# Altium PCB BMS(1).PcbDoc (part 1 of 2)
Units mm, origin at the board's own origin, x right, y up, seen from the top; angles counter-clockwise.
Board outline 152.4 x 101.6 mm, 20 copper layers (F.Cu, F.Mask, B.Cu, B.Mask, In1.Cu, F.SilkS, In2.Cu, B.SilkS, F.Adhes, B.Adhes, F.Paste, B.Paste, Dwgs.User, Cmts.User, Eco1.User, Eco2.User, Edge.Cuts, Margin, B.CrtYd, F.CrtYd); 59 components, 46 nets, 180 pads, 56 vias.
Unrouted connection lines stored in the file: 55.
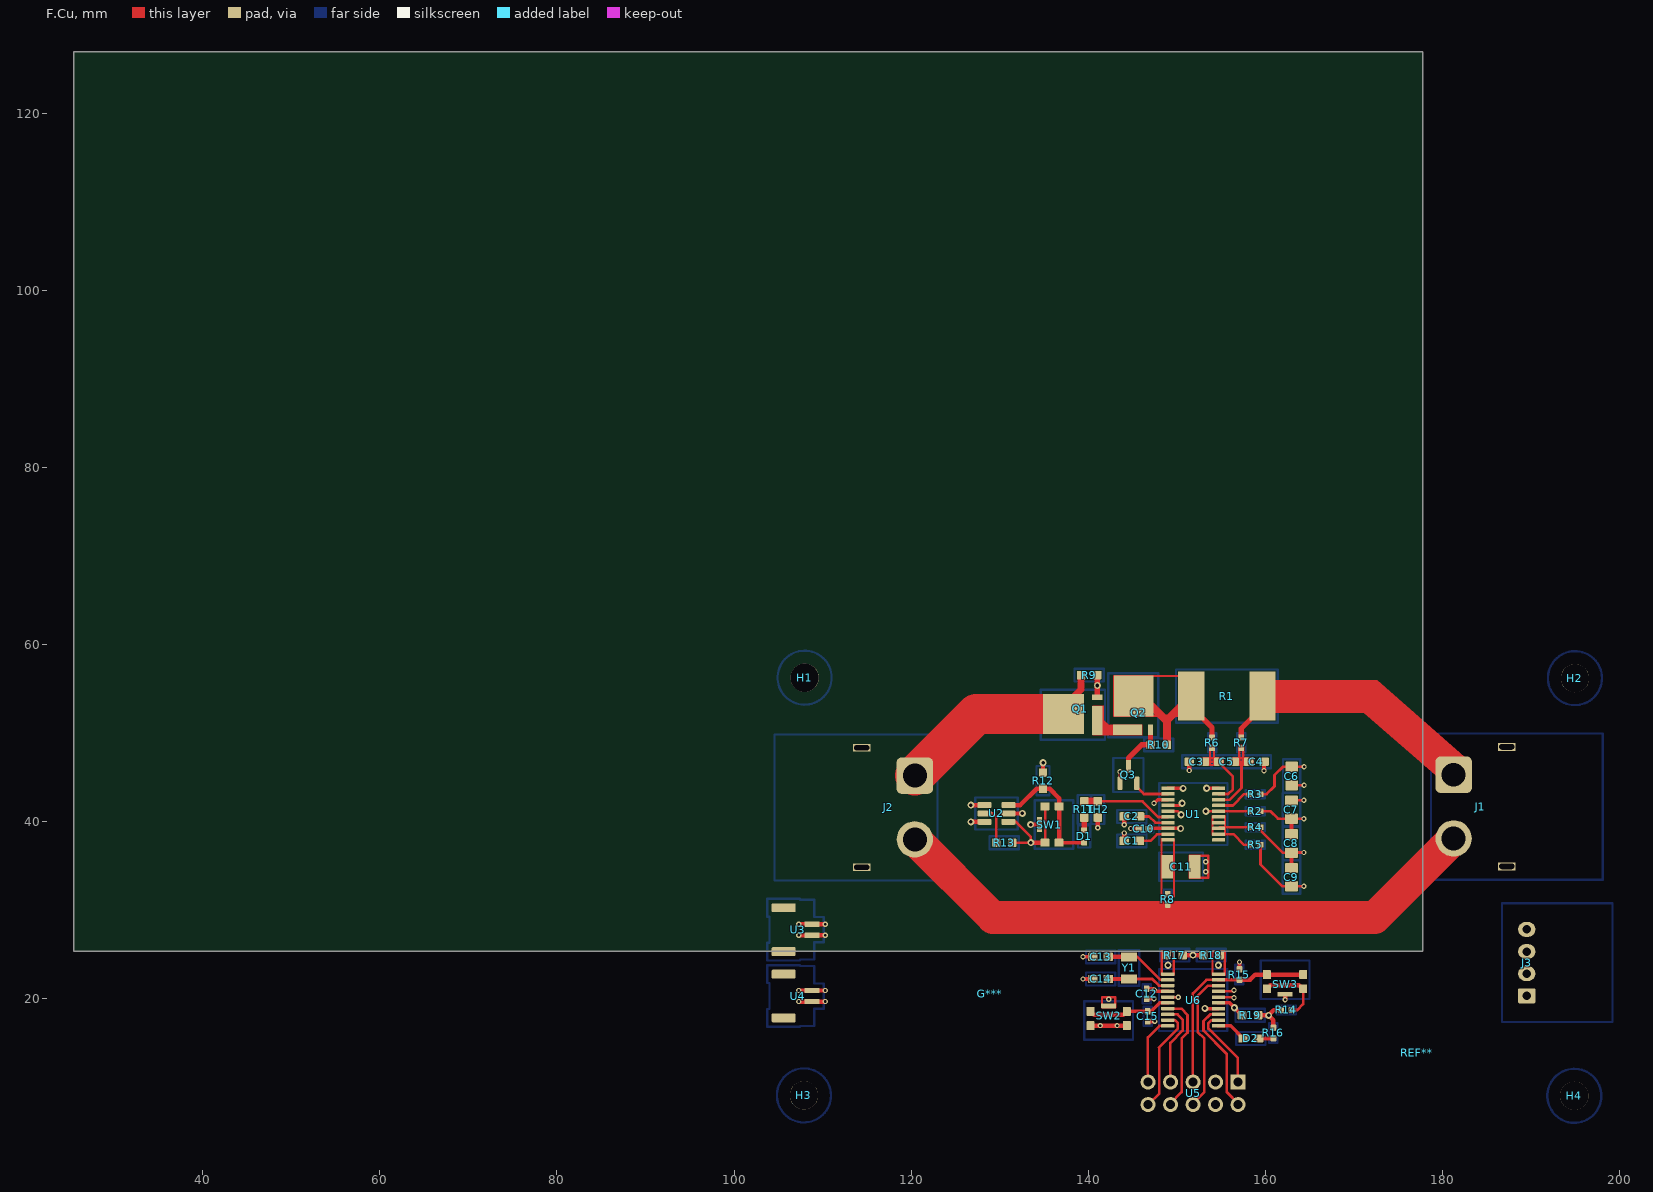
[diagram p0: F.Cu view]
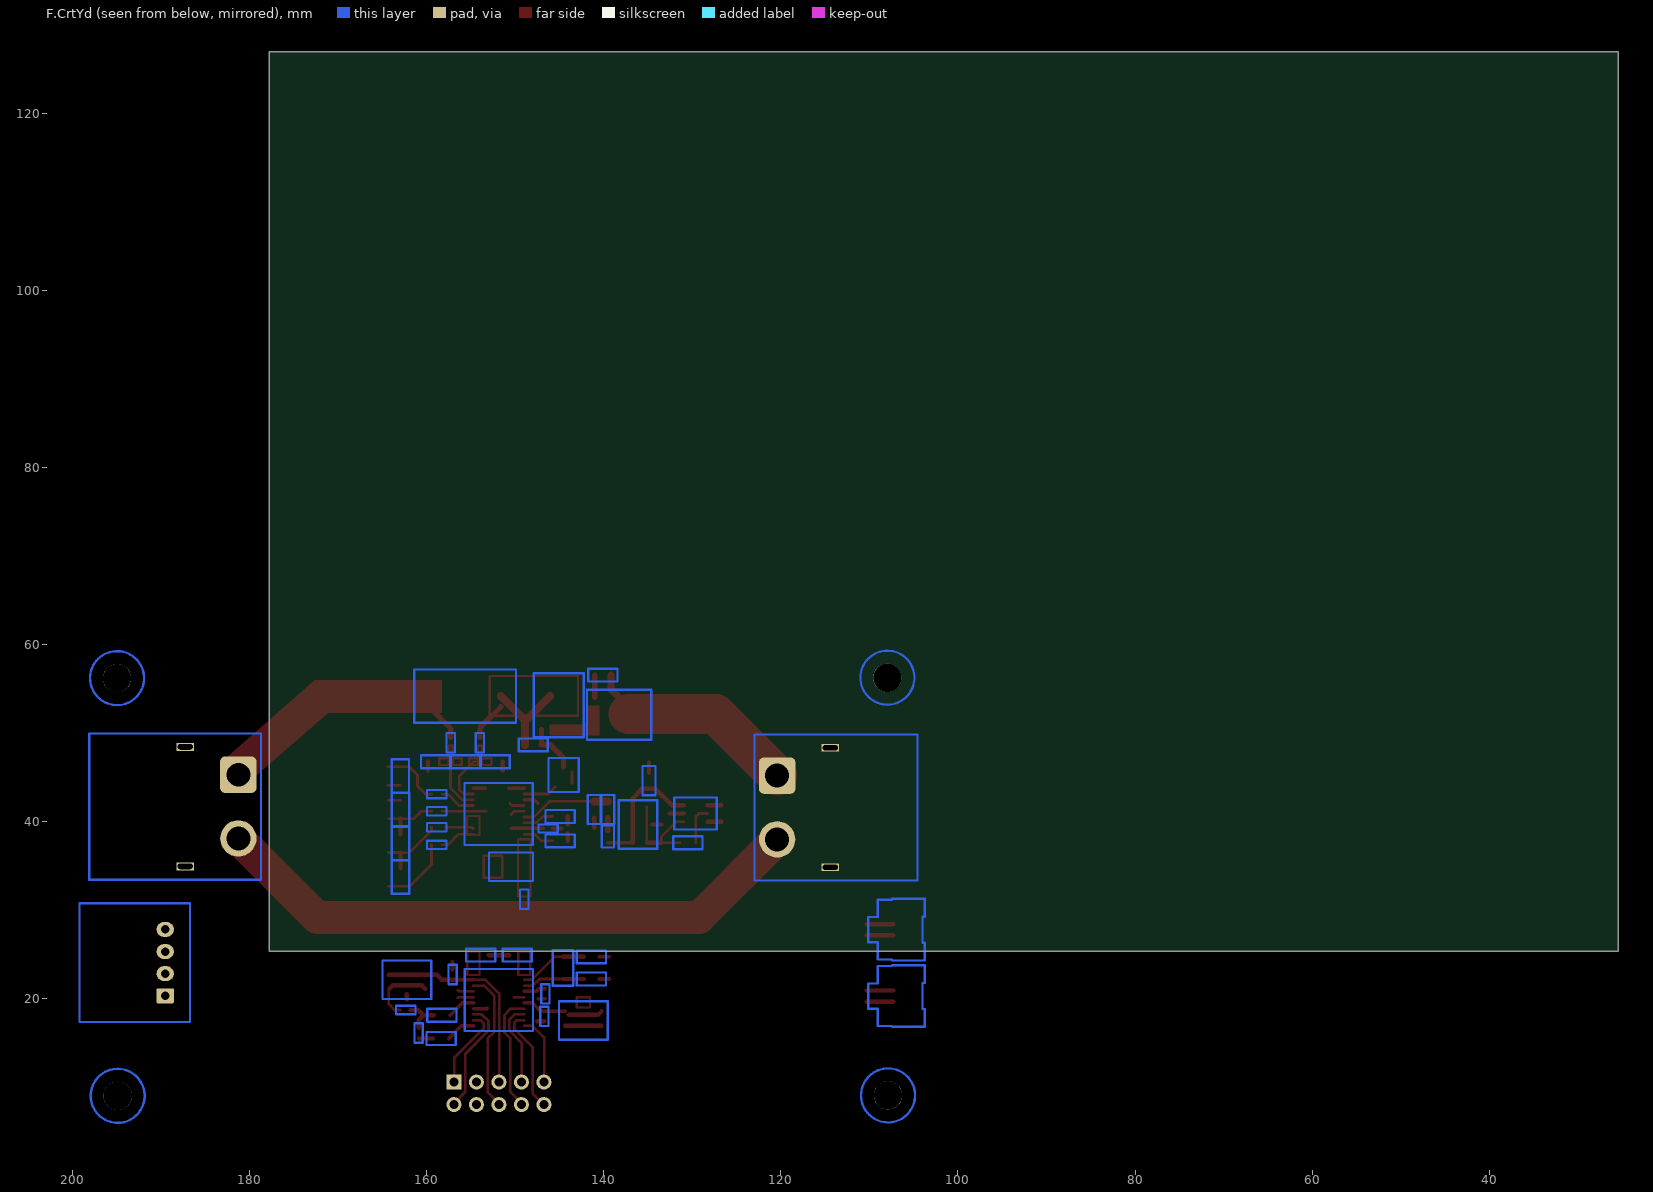
[diagram p1: F.CrtYd view, seen from below]
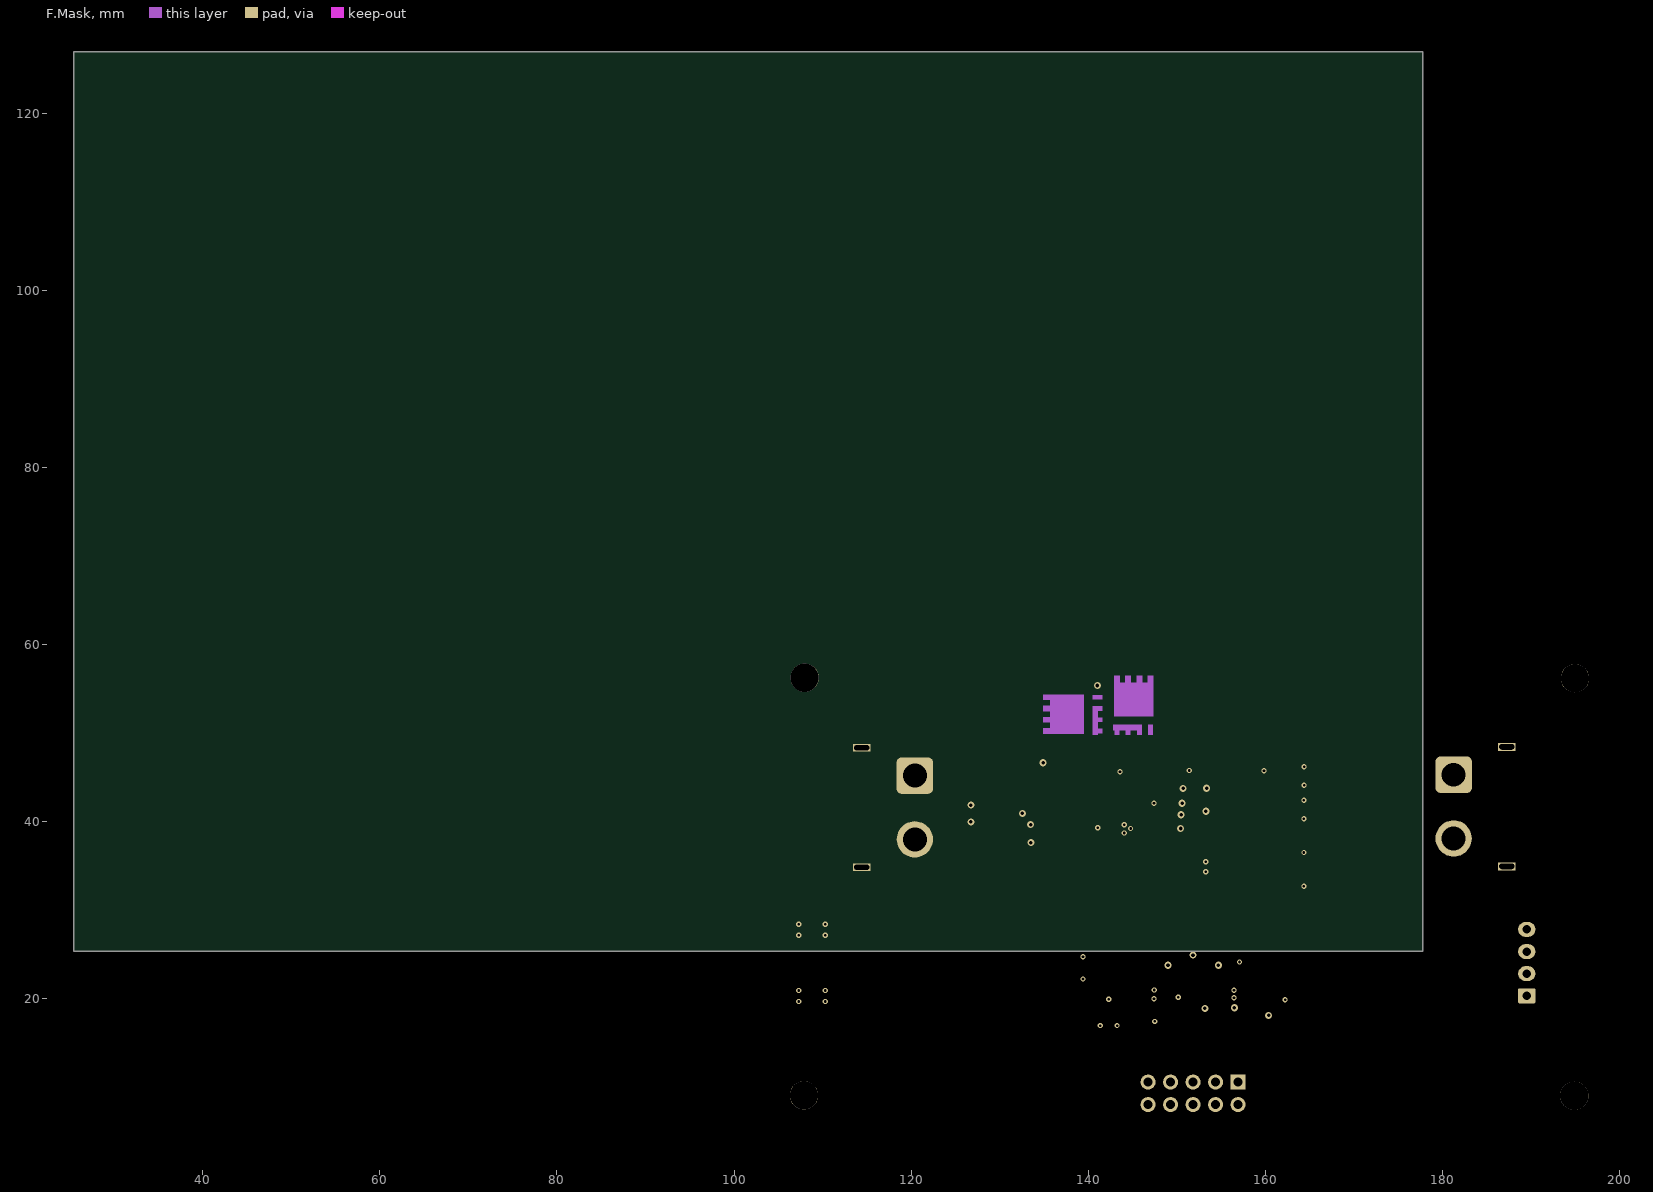
[diagram p2: F.Mask]
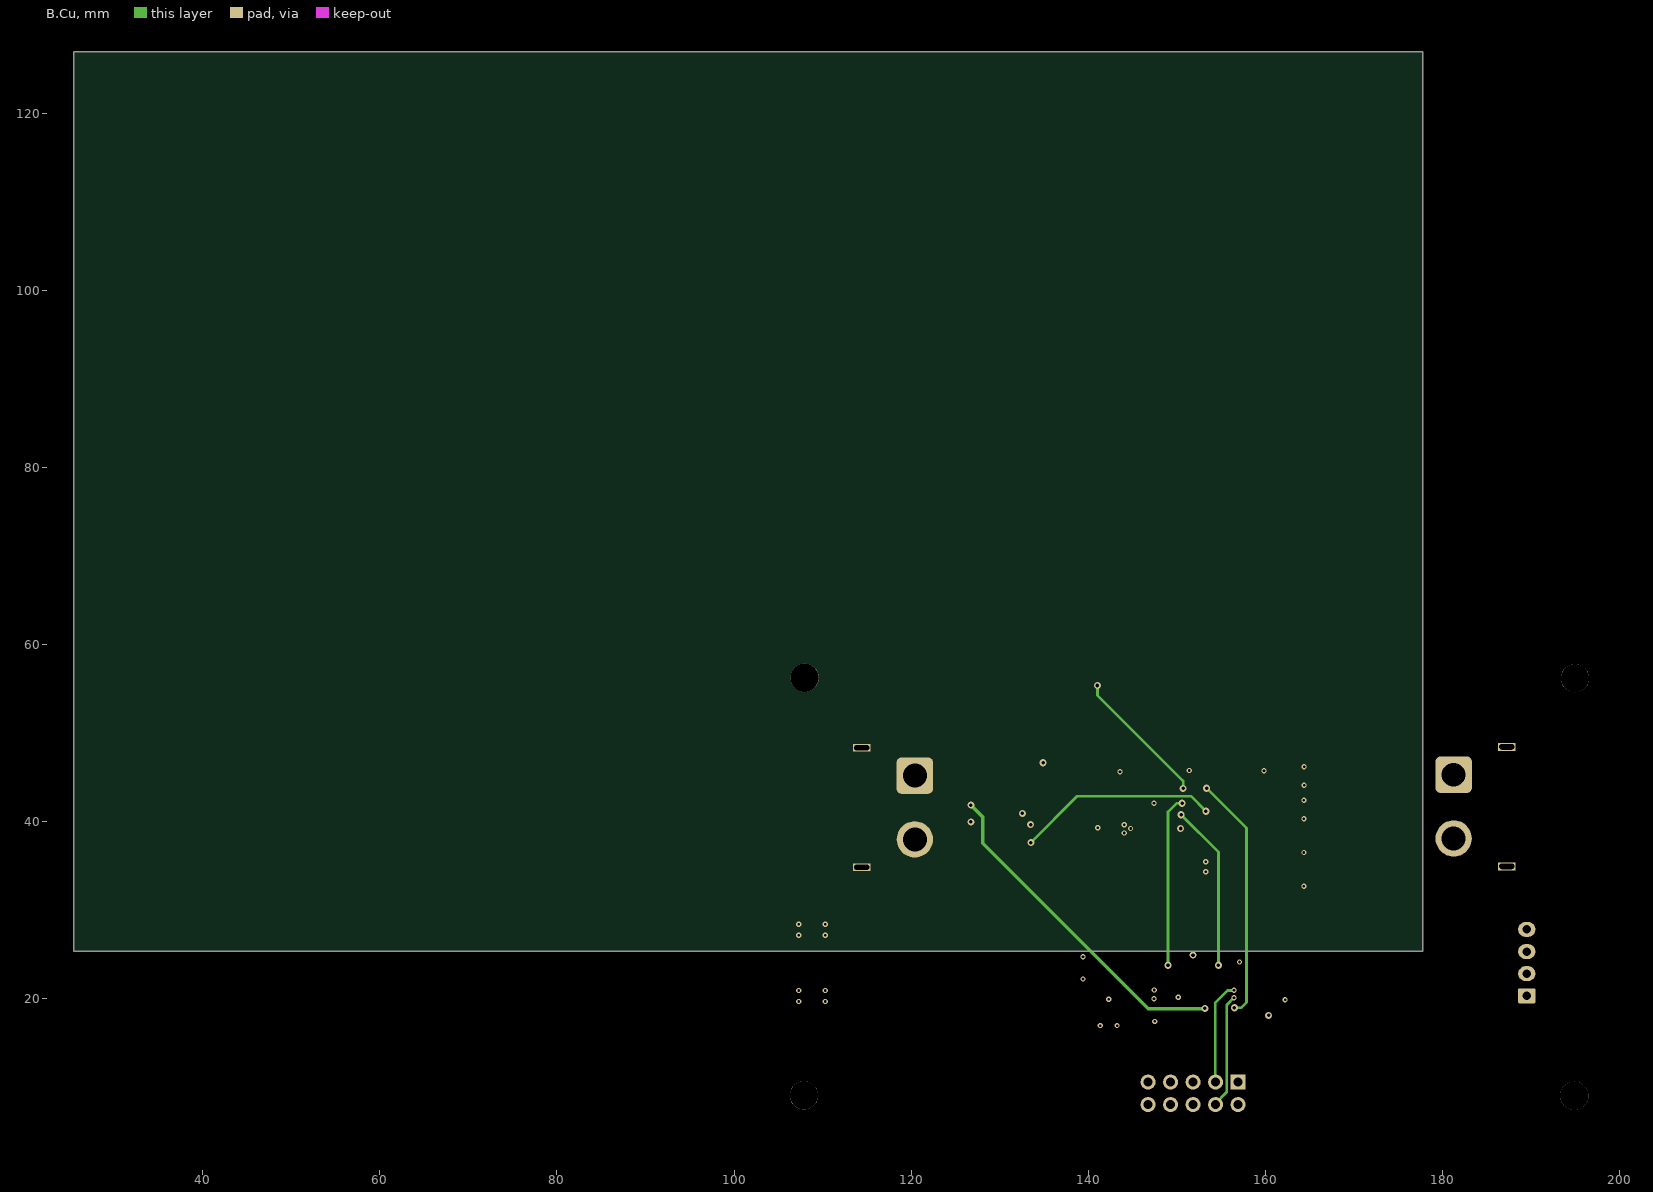
[diagram p3: B.Cu]
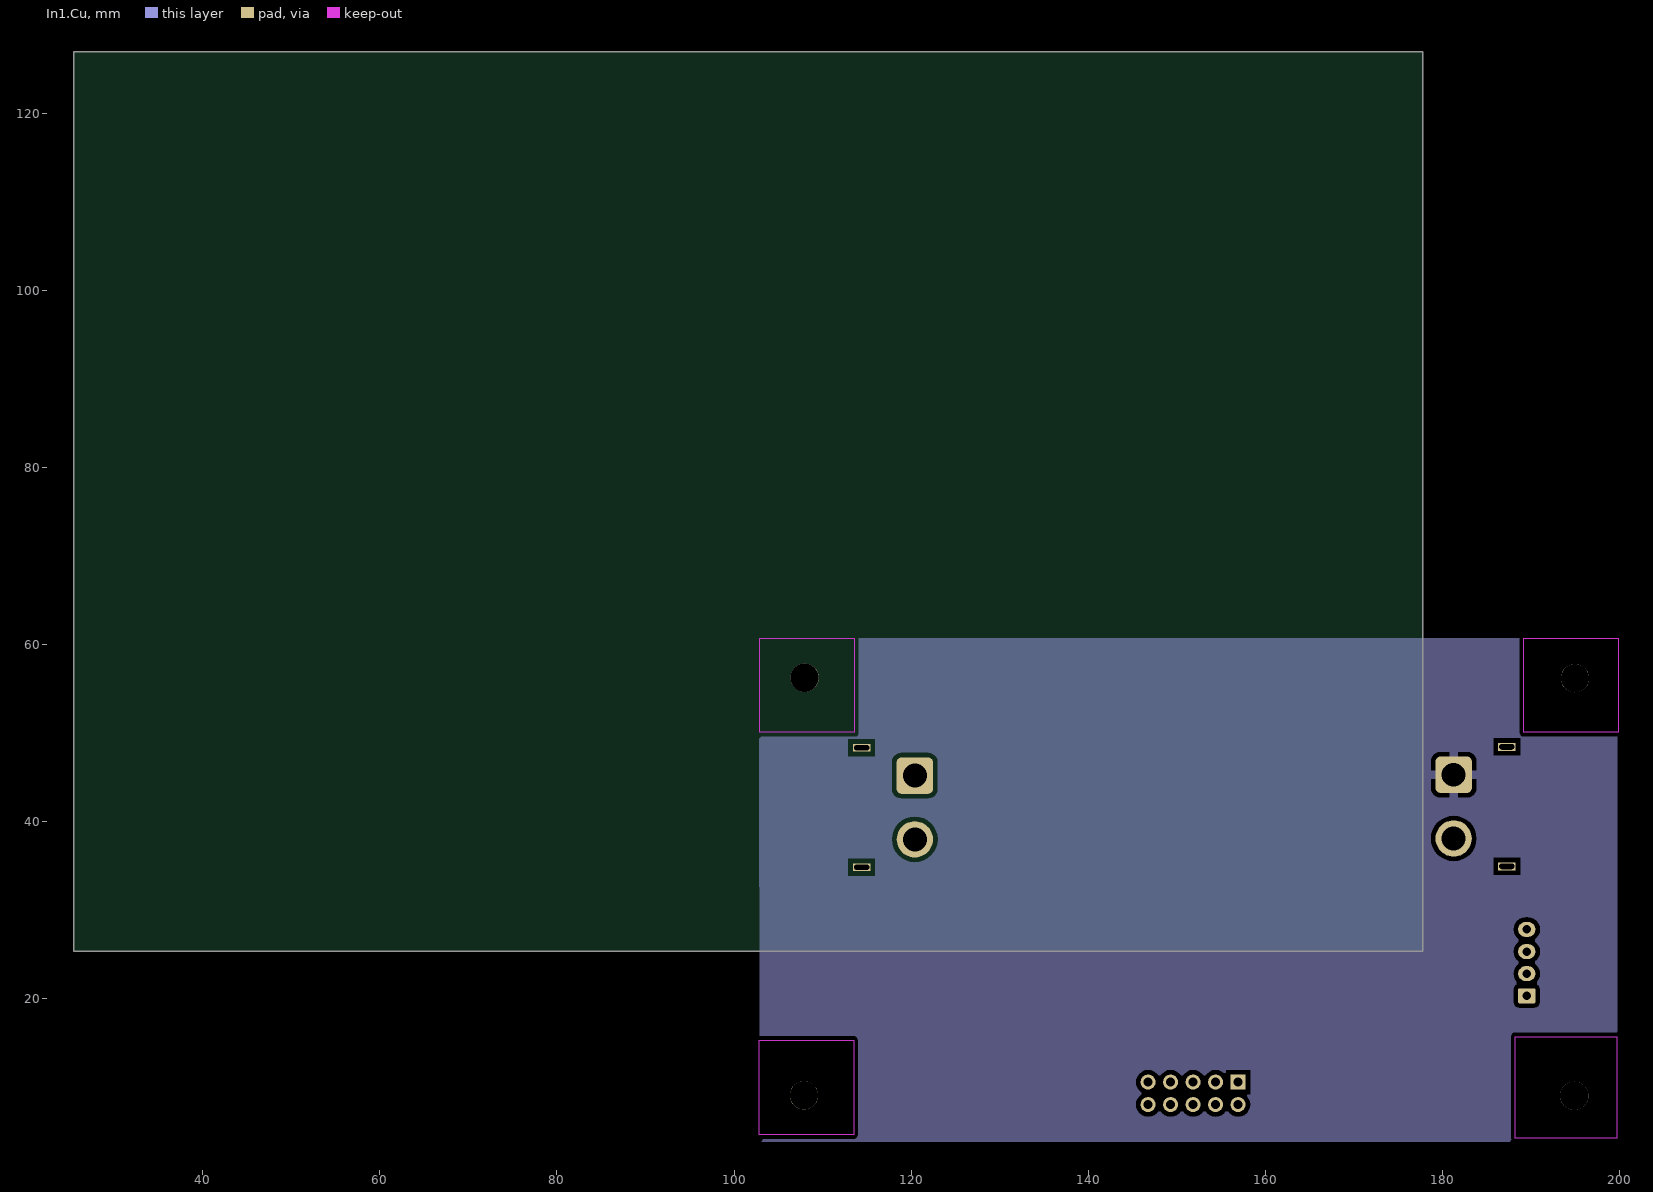
[diagram p4: In1.Cu]
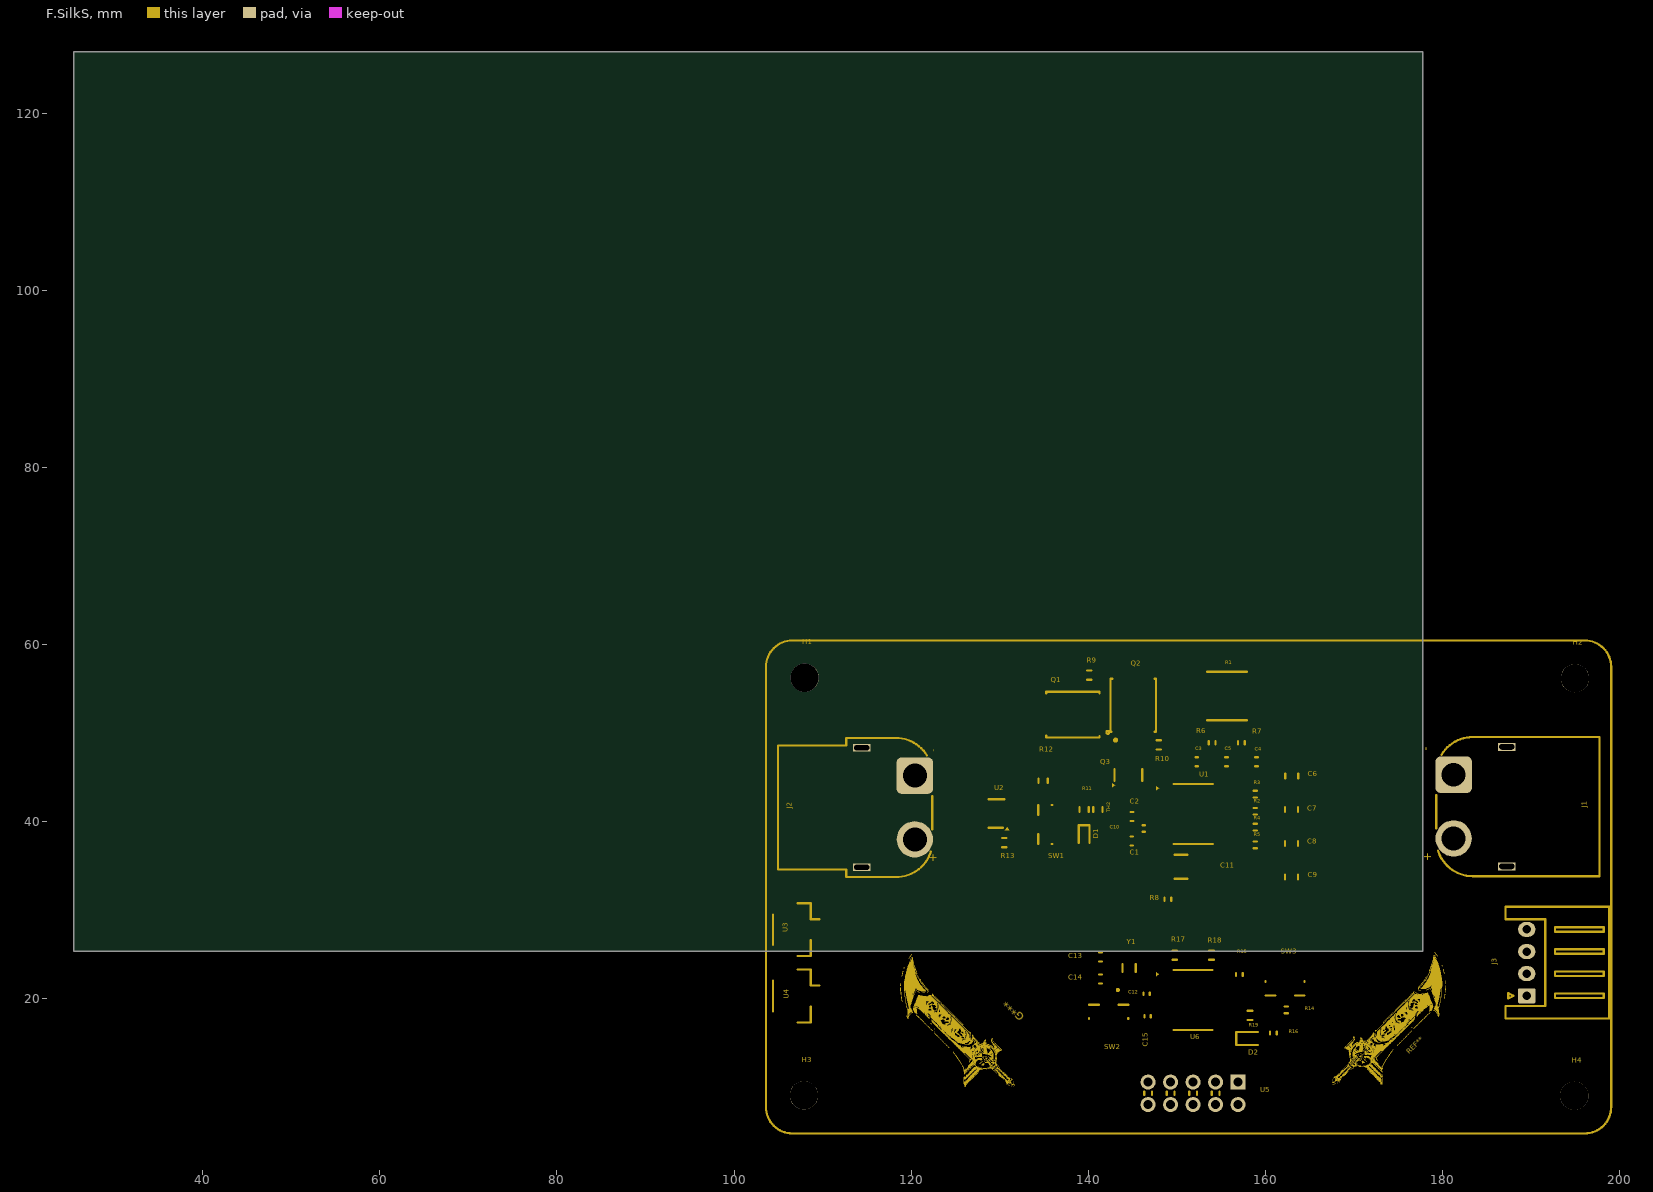
[diagram p5: F.SilkS]
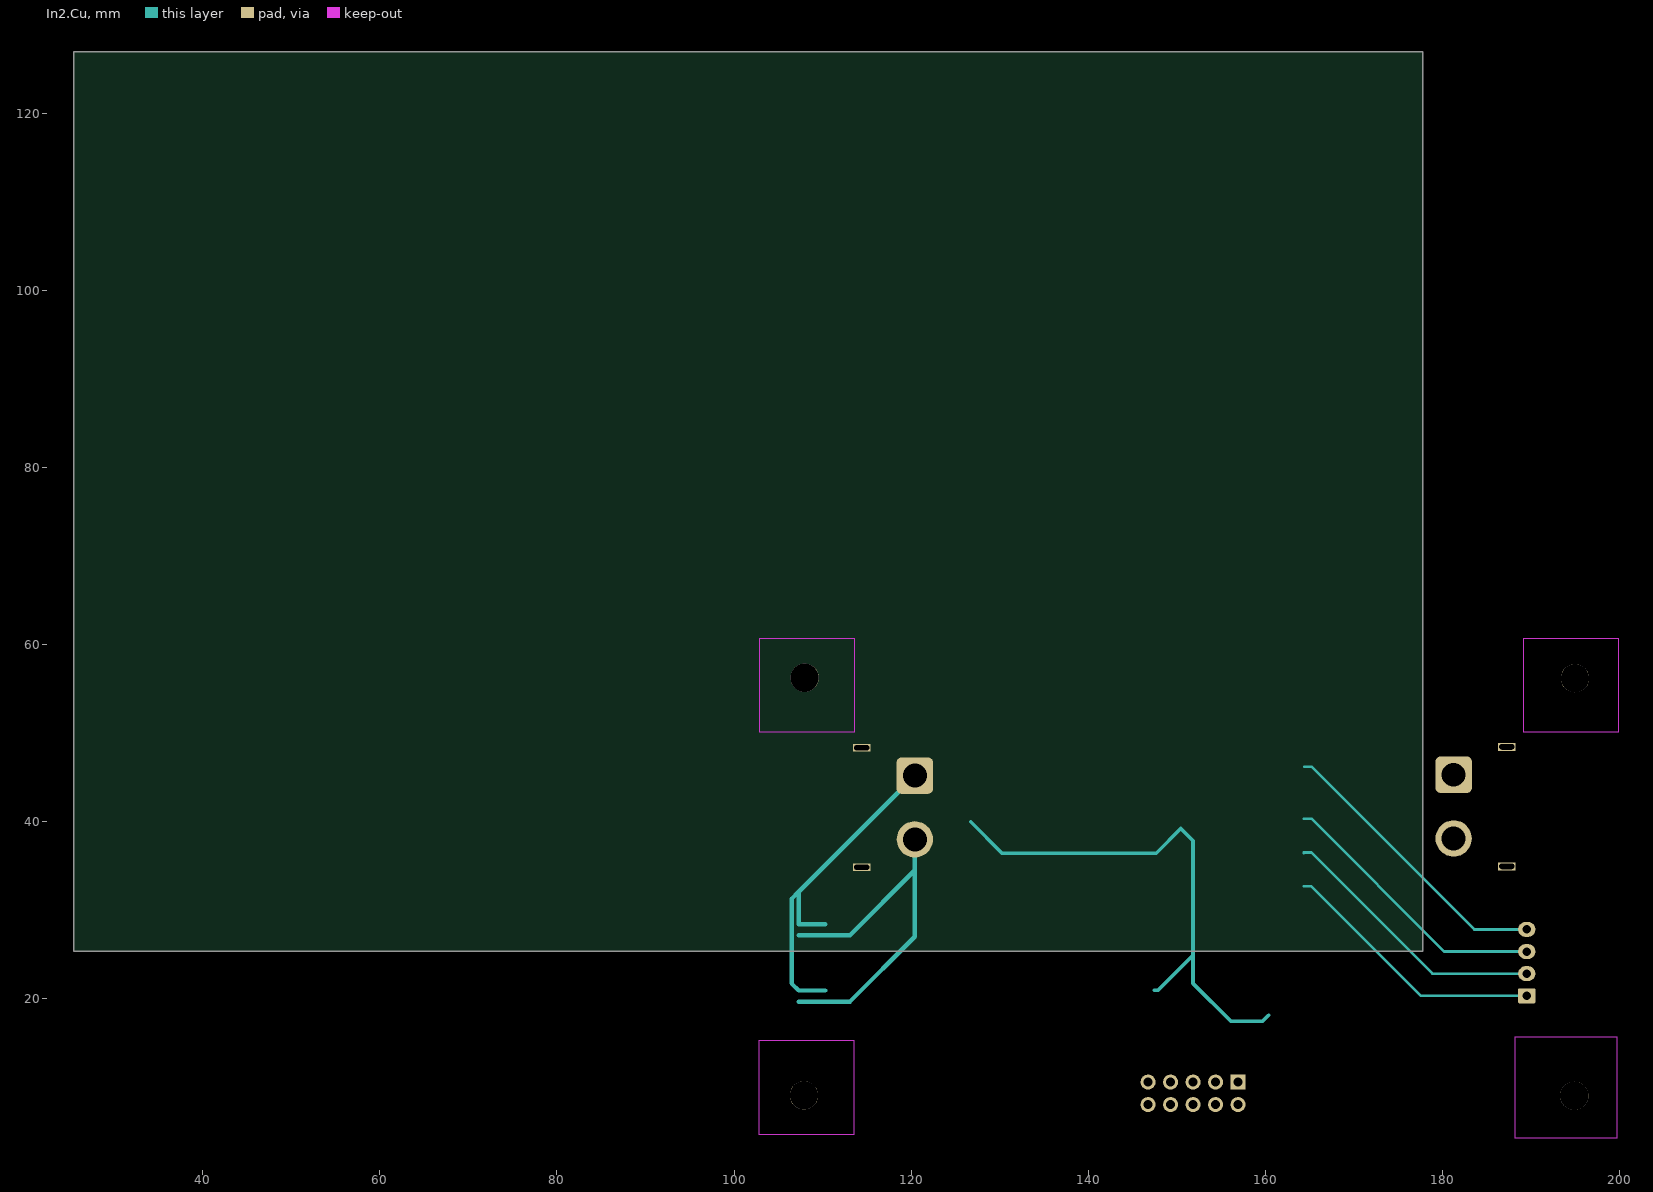
[diagram p6: In2.Cu]
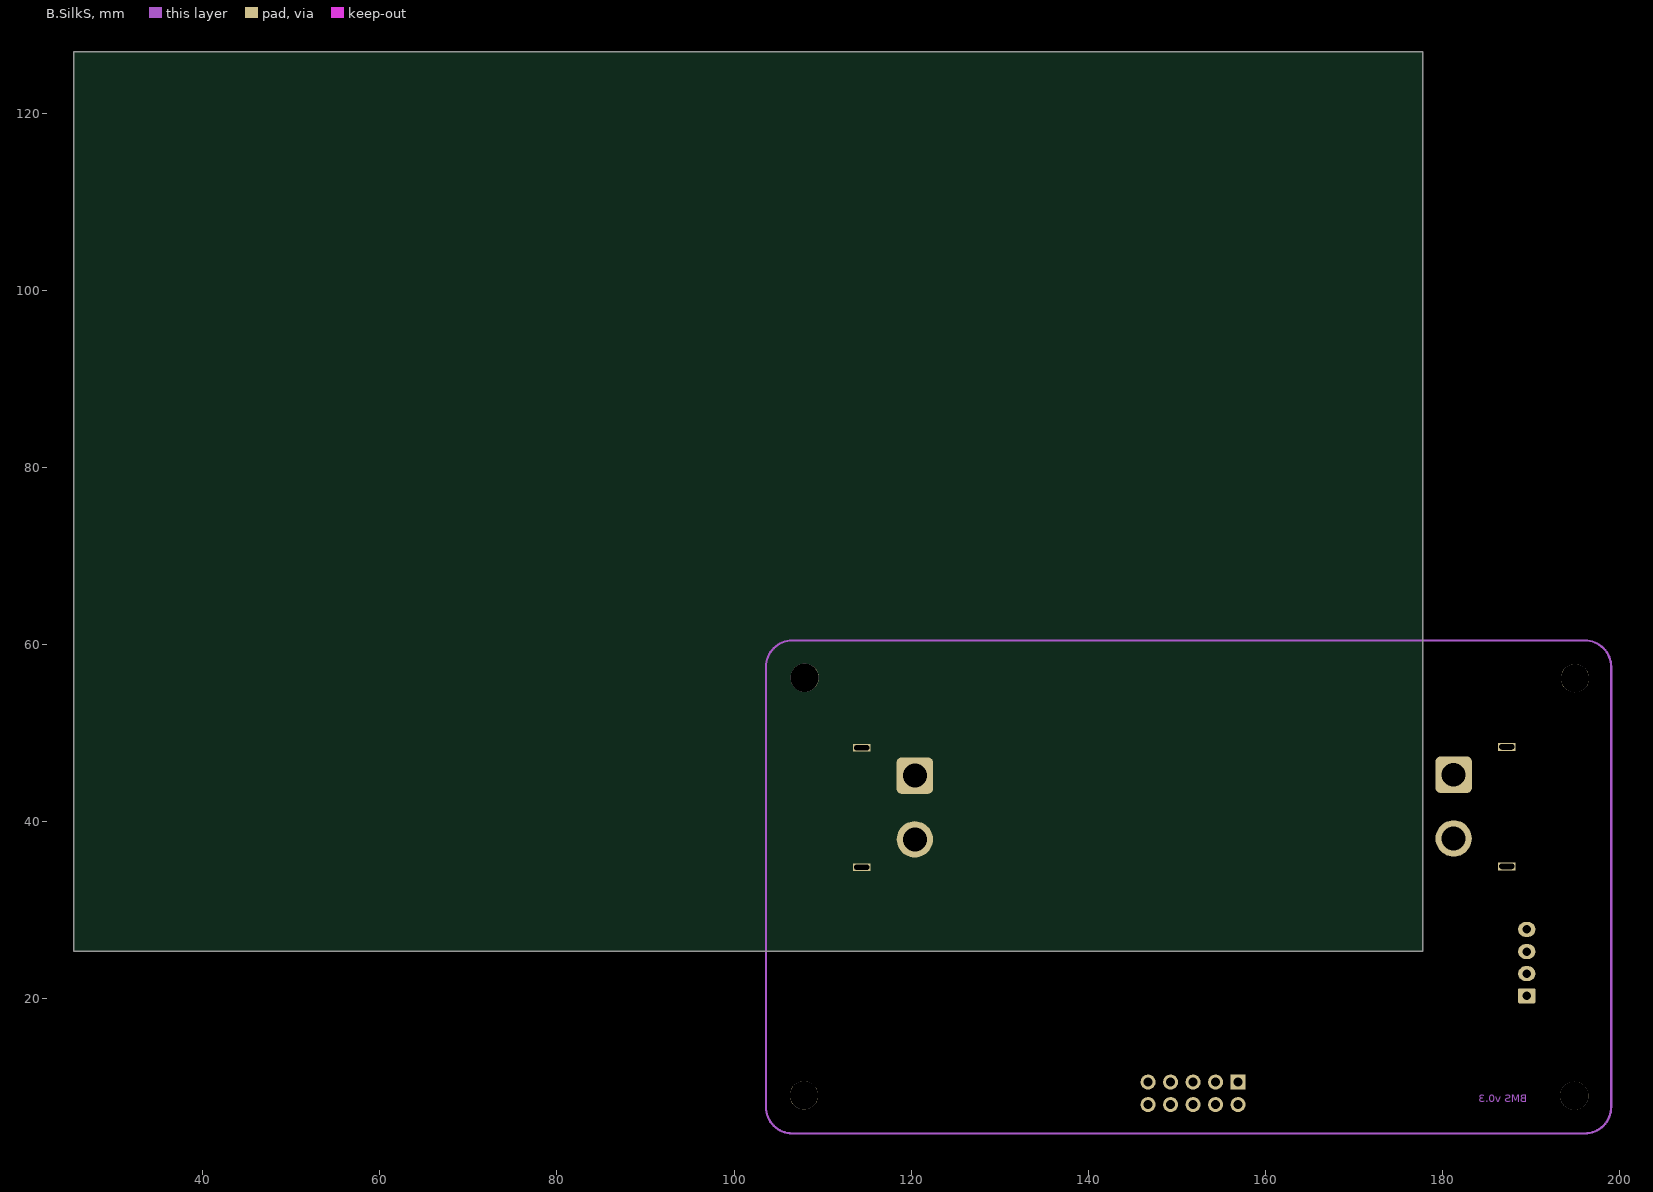
[diagram p7: B.SilkS]
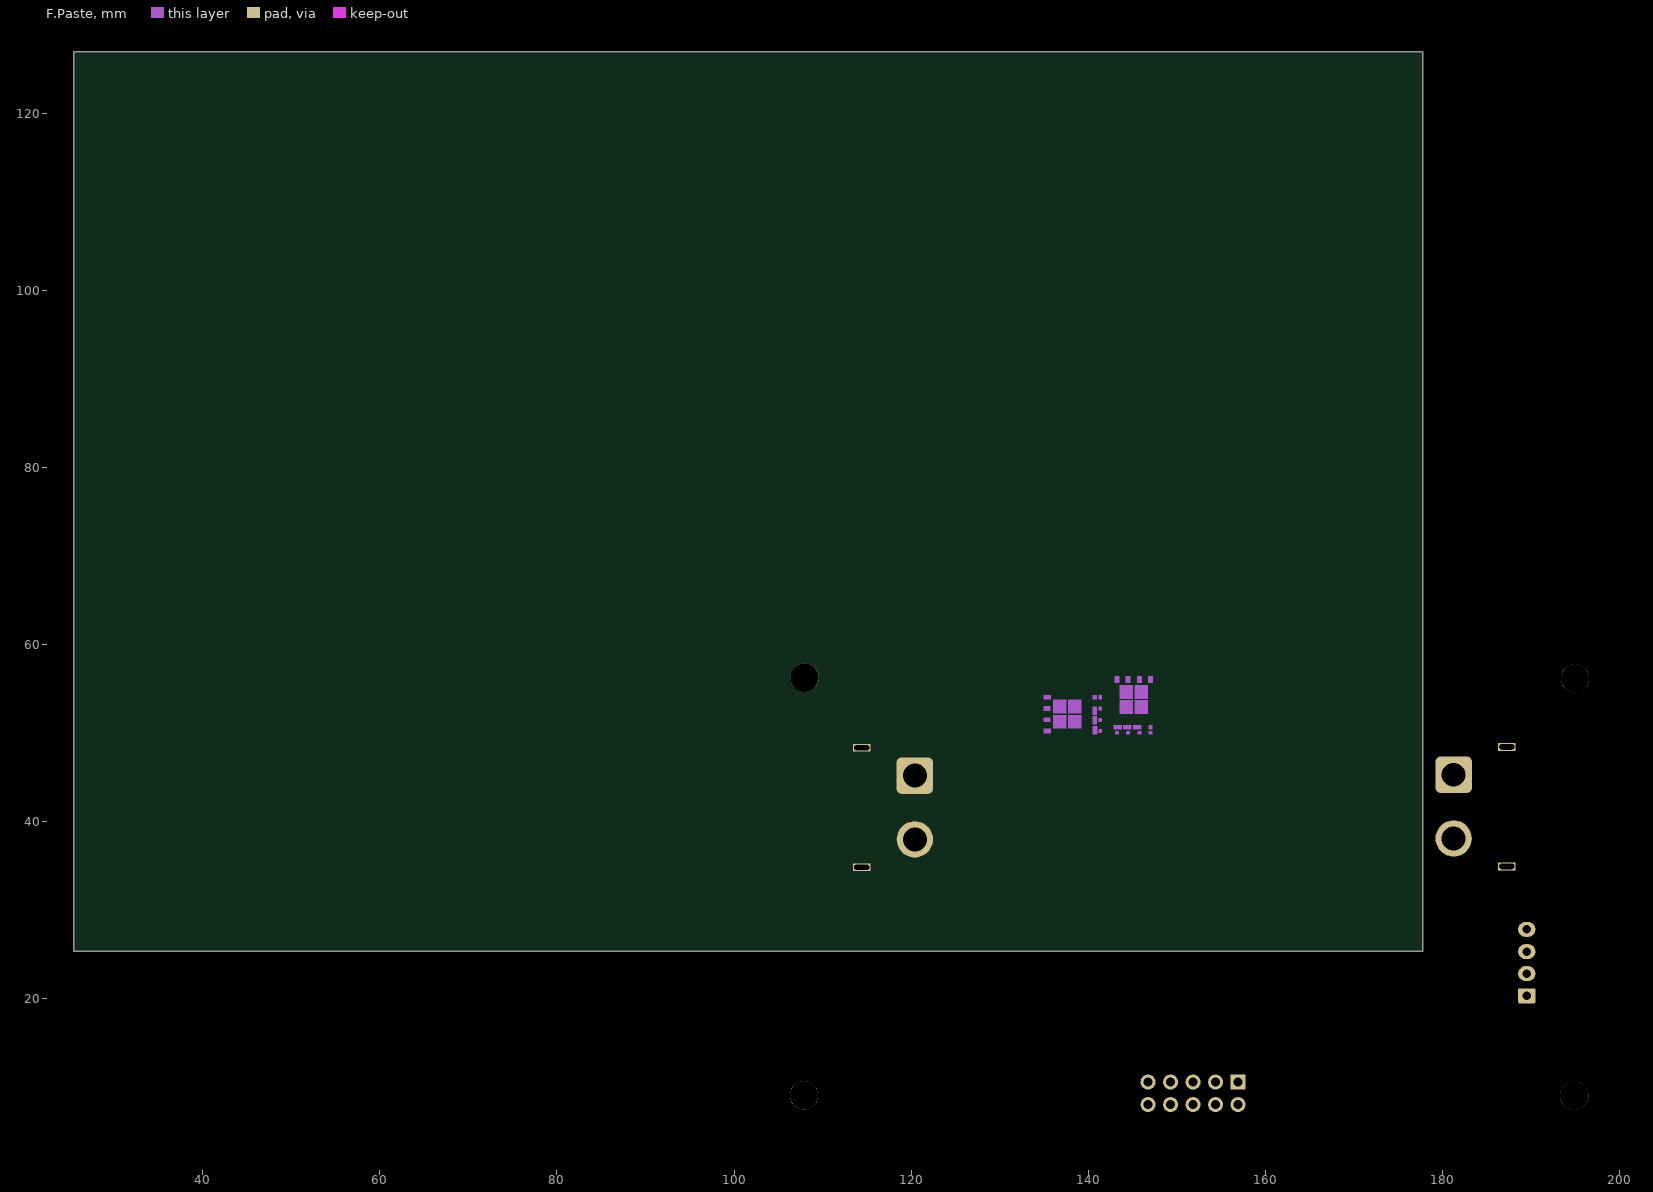
[diagram p8: F.Paste]
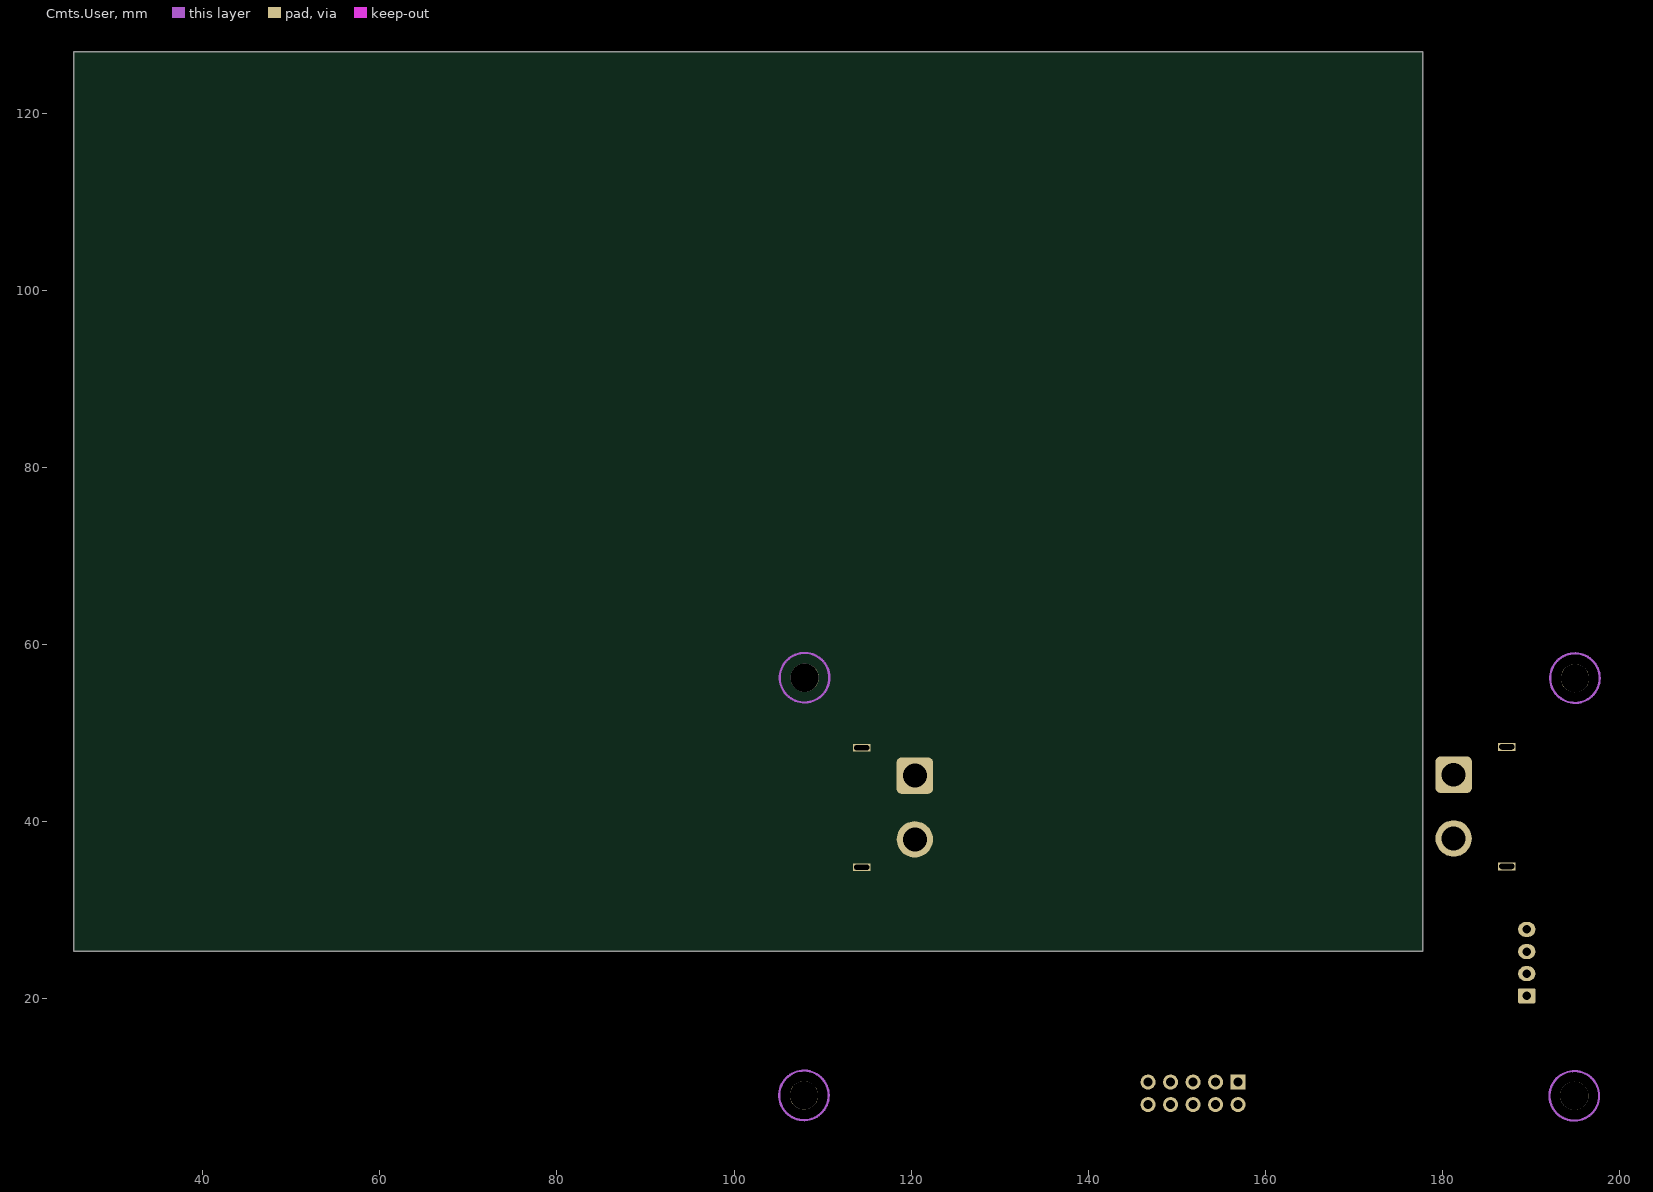
[diagram p9: Cmts.User]
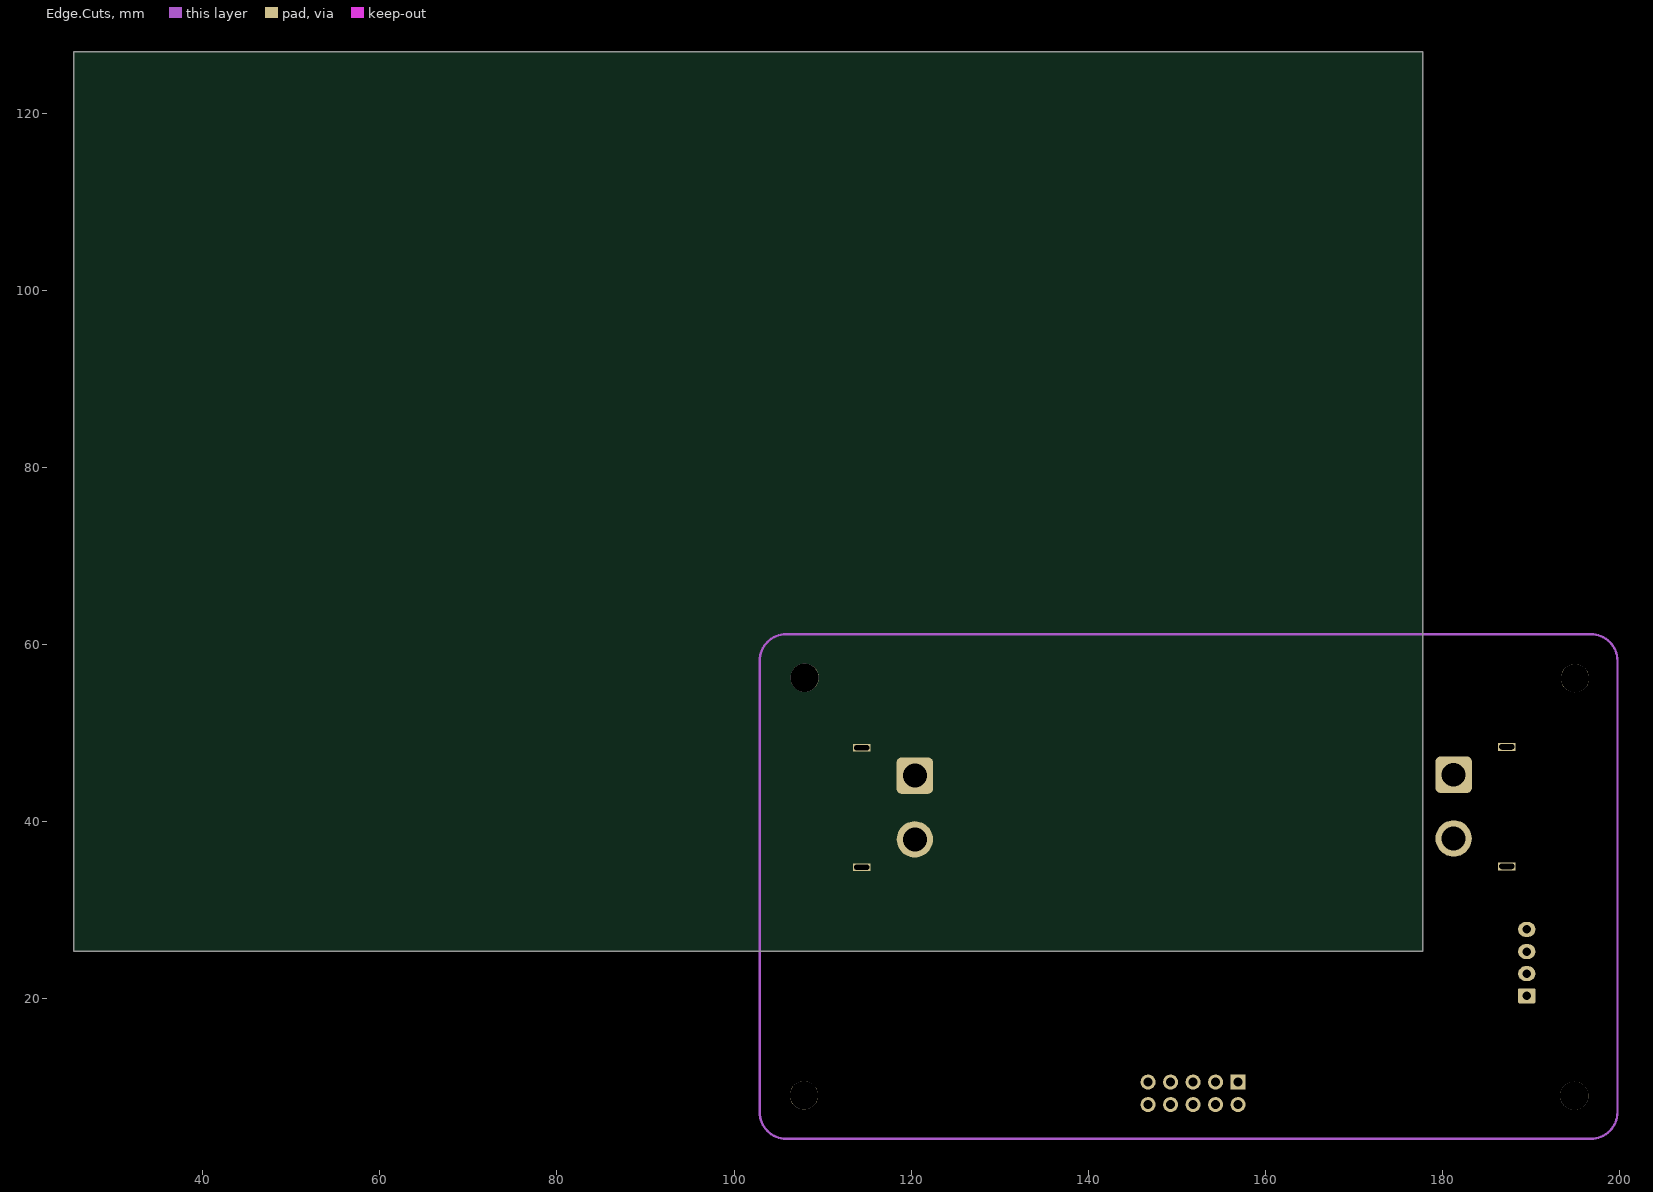
[diagram p10: Edge.Cuts]

## Layer stack, top to bottom
Top Solder: solder mask 0.0102, Solder Resist, Dk 3.5
F.Cu: signal copper 0.0356
Dielectric 1: dielectric 0.32, FR-4, Dk 4.8
F.Mask: signal copper 0.0356
Dielectric2: dielectric 0.32, FR-4, Dk 4.8
B.Cu: signal copper 0.0356
Dielectric3: dielectric 0.32, FR-4, Dk 4.8
B.Mask: signal copper 0.0356
Dielectric4: dielectric 0.32, FR-4, Dk 4.8
In1.Cu: signal copper 0.0356
Dielectric5: dielectric 0.32, FR-4, Dk 4.8
F.SilkS: signal copper 0.0356
Dielectric6: dielectric 0.32, FR-4, Dk 4.8
In2.Cu: signal copper 0.0356
Dielectric7: dielectric 0.32, FR-4, Dk 4.8
B.SilkS: signal copper 0.0356
Dielectric8: dielectric 0.32, FR-4, Dk 4.8
F.Adhes: signal copper 0.0356
Dielectric9: dielectric 0.32, FR-4, Dk 4.8
B.Adhes: signal copper 0.0356
Dielectric10: dielectric 0.32, FR-4, Dk 4.8
F.Paste: signal copper 0.0356
Dielectric11: dielectric 0.32, FR-4, Dk 4.8
B.Paste: signal copper 0.0356
Dielectric12: dielectric 0.32, FR-4, Dk 4.8
Dwgs.User: signal copper 0.0356
Dielectric13: dielectric 0.32, FR-4, Dk 4.8
Cmts.User: signal copper 0.0356
Dielectric14: dielectric 0.32, FR-4, Dk 4.8
Eco1.User: signal copper 0.0356
Dielectric15: dielectric 0.32, FR-4, Dk 4.8
Eco2.User: signal copper 0.0356
Dielectric16: dielectric 0.32, FR-4, Dk 4.8
Edge.Cuts: signal copper 0.0356
Dielectric17: dielectric 0.32, FR-4, Dk 4.8
Margin: signal copper 0.0356
Dielectric18: dielectric 0.32, FR-4, Dk 4.8
B.CrtYd: signal copper 0.0356
Dielectric19: dielectric 0.32, FR-4, Dk 4.8
F.CrtYd: signal copper 0.0356
Bottom Solder: solder mask 0.0102, Solder Resist, Dk 3.5

## Board outline
25.4,25.4 177.8,25.4 177.8,127 25.4,127

## Design rules (kind name [scope] priority, off if disabled: settings)
Clearance "Clearence 0.5_Polygon" [InNamedPolygon('In1.Cu-PACK-')] p1: gap=0.5 ignorepadtopadclearanceinfootprint=FALSE
MinimumSolderMaskSliver [All] p1: minsoldermaskwidth=0
PolygonConnect Polygon_In1.Cu-PACK-_ConnectDirect [IsNamedPolygon('In1.Cu-PACK-') vs IsVia] p1: connectstyle=Direct reliefconductorwidth=0.254 reliefentries=4 polygonreliefangle="90 Angle" airgapwidth=0.254
PolygonConnect Polygon_In1.Cu-PACK-_ConnectRelief45 [IsNamedPolygon('In1.Cu-PACK-') vs (IsThruPin or IsSMTPin) and (PadShape_AllLayers = 'Round')] p2: connectstyle=Relief reliefconductorwidth=1 reliefentries=4 polygonreliefangle="45 Angle" airgapwidth=0.5
PolygonConnect Polygon_In1.Cu-PACK-_ConnectRelief90 [IsNamedPolygon('In1.Cu-PACK-') vs (IsThruPin or IsSMTPin) and (PadShape_AllLayers <> 'Round')] p3: connectstyle=Relief reliefconductorwidth=1 reliefentries=4 polygonreliefangle="90 Angle" airgapwidth=0.5
RoutingVias [All] p1: holewidth=0.711 width=1.27 viastyle="Through Hole" minholewidth=0.711 minwidth=1.27 maxholewidth=0.711 maxwidth=1.27
SilkToSilkClearance [All] p1: silktosilkclearance=0
SilkToSolderMaskClearance [IsPad] p1: minsilkscreentomaskgap=0 clearancetoexposedcopper=TRUE
SolderMaskExpansion [All] p1: expansion=0.102 istentingtop=FALSE
Width [All] p1: maxlimit=10 minlimit=0.254 preferedwidth=0.254 midlayer3_maxwidth=0.254 midlayer9_maxwidth=0.254 midlayer11_maxwidth=0.254 midlayer15_maxwidth=0.254 midlayer17_maxwidth=0.254 midlayer21_maxwidth=0.254 midlayer23_maxwidth=0.254 midlayer27_maxwidth=0.254 midlayer29_maxwidth=0.254 minimp=50.000000 maximp=50.000000 favimp=50.000000
27 further rules are at their usual default settings.

## Components (designator, comment, footprint, x,y, rotation, side; value= is the part's Value field where it differs from the comment)
C1 "Comment" C_0603_1608Metric_Pad1.08x0.95mm_HandSolder 144.938,37.84 r0 top value=1uF
C2 "Comment" C_0603_1608Metric_Pad1.08x0.95mm_HandSolder 144.95,40.602 r0 top value=1uF
C3 "Comment" C_0603_1608Metric_Pad1.08x0.95mm_HandSolder 152.275,46.79 r0 top value=0.1uF
C4 "Comment" C_0603_1608Metric_Pad1.08x0.95mm_HandSolder 159.012,46.79 r180 top value=0.1uF
C5 "Comment" C_0603_1608Metric_Pad1.08x0.95mm_HandSolder 155.637,46.79 r0 top value=0.1uF
C6 "Comment" C_0805_2012Metric_Pad1.18x1.45mm_HandSolder 162.997,45.173 r90 top value=1uF
C7 "Comment" C_0805_2012Metric_Pad1.18x1.45mm_HandSolder 162.977,41.373 r90 top value=1uF
C8 "Comment" C_0805_2012Metric_Pad1.18x1.45mm_HandSolder 162.977,37.553 r90 top value=1uF
C9 "Comment" C_0805_2012Metric_Pad1.18x1.45mm_HandSolder 162.977,33.743 r90 top value=1uF
C10 "Comment" C_0402_1005Metric_Pad0.74x0.62mm_HandSolder 146.3,39.24 r0 top value=4.7pF
C11 "Comment" C_1210_3225Metric_Pad1.33x2.70mm_HandSolder 150.497,34.92 r180 top value=10uF
C12 "Comment" C_0402_1005Metric_Pad0.74x0.62mm_HandSolder 146.613,20.565 r270 top value=100nF
C13 "Comment" C_0603_1608Metric_Pad1.08x0.95mm_HandSolder 141.412,24.74 r180 top value=12pF
C14 "Comment" C_0603_1608Metric_Pad1.08x0.95mm_HandSolder 141.412,22.24 r180 top value=12pF
C15 "Comment" C_0402_1005Metric_Pad0.74x0.62mm_HandSolder 146.725,18.015 r270 top value=0.1uF
D1 "Comment" D_SOD-523 139.55,38.34 r270 top value=1N4148WT
D2 "Comment" D_0603_1608Metric_Pad1.05x0.95mm_HandSolder 158.394,15.52 r0 top value=BLUE
G*** "Comment" riven_sword_20mm_quality 128.875,20.584 r315 top value=LOGO
H1 "Comment" MountingHole_3.2mm_M3_DIN965 107.971,56.28 r0 top value=MountingHole
H2 "Comment" MountingHole_3.2mm_M3_DIN965 195,56.23 r0 top value=MountingHole
H3 "Comment" MountingHole_3.2mm_M3_DIN965 107.9,9.09 r0 top value=MountingHole
H4 "Comment" MountingHole_3.2mm_M3_DIN965 194.929,9.04 r0 top value=MountingHole
J1 "Comment" AMASS_XT60PW-M_1x02_P7.20mm_Horizontal 181.3,45.315 r270 top value=XT60-M
J2 "Comment" AMASS_XT60PW-F_1x02_P7.20mm_Horizontal 120.425,45.215 r90 top value=XT60-F
J3 "Comment" JST_XH_S4B-XH-A_1x04_P2.50mm_Horizontal 189.555,20.34 r90 top value=4-1971800-1
Q1 "Comment" TRANS_BSC014N04LSIATMA1 138.275,52.105 r180 top value=BSC014N04LSIATMA1
Q2 "Comment" TRANS_BSC014N04LSIATMA1 145.099,53.165 r90 top value=BSC014N04LSIATMA1
Q3 "Comment" SOT-23 144.554,45.29 r90 top value=BSS84
R1 "Comment" R_3920 155.679,54.207 r0 top value=R
R2 "Comment" R_0402_1005Metric_Pad0.72x0.64mm_HandSolder 158.878,41.19 r0 top value=100
R3 "Comment" R_0402_1005Metric_Pad0.72x0.64mm_HandSolder 158.875,43.115 r0 top value=100
R4 "Comment" R_0402_1005Metric_Pad0.72x0.64mm_HandSolder 158.878,39.385 r0 top value=100
R5 "Comment" R_0402_1005Metric_Pad0.72x0.64mm_HandSolder 158.878,37.395 r0 top value=100
R6 "Comment" R_0402_1005Metric_Pad0.72x0.64mm_HandSolder 154.003,48.924 r270 top value=100
R7 "Comment" R_0402_1005Metric_Pad0.72x0.64mm_HandSolder 157.305,48.924 r270 top value=100
R8 "Comment" R_0402_1005Metric_Pad0.72x0.64mm_HandSolder 149,31.24 r270 top value=100
R9 "Comment" R_0603_1608Metric_Pad0.98x0.95mm_HandSolder 140.124,56.565 r0 top value=1M
R10 "Comment" R_0603_1608Metric_Pad0.98x0.95mm_HandSolder 147.98,48.69 r180 top value=1M
R11 "Comment" R_0603_1608Metric_Pad0.98x0.95mm_HandSolder 139.555,41.39 r270 top value=10k
R12 "Comment" R_0603_1608Metric_Pad0.98x0.95mm_HandSolder 134.908,44.64 r90 top value=47k
R13 "Comment" R_0603_1608Metric_Pad0.98x0.95mm_HandSolder 130.525,37.64 r0 top value=10k
R14 "Comment" R_0402_1005Metric_Pad0.72x0.64mm_HandSolder 162.397,18.74 r0 top value=330
R15 "Comment" R_0402_1005Metric_Pad0.72x0.64mm_HandSolder 157.099,22.74 r90 top value=10k
R16 "Comment" R_0402_1005Metric_Pad0.72x0.64mm_HandSolder 160.937,16.14 r90 top value=10k
R17 "Comment" R_0603_1608Metric_Pad0.98x0.95mm_HandSolder 149.788,24.94 r180 top value=4.7k
R18 "Comment" R_0603_1608Metric_Pad0.98x0.95mm_HandSolder 153.938,24.94 r0 top value=4.7k
R19 "Comment" R_0603_1608Metric_Pad0.98x0.95mm_HandSolder 158.299,18.14 r180 top value=4.7k
REF** "Comment" riven_sword_20mm_quality_mirrored 177.102,13.916 r45 top value=riven_sword_20mm_quality_mirrored
SW1 "Comment" SW_SPST_CK_KMS2xxG 135.925,39.69 r90 top value=CK_KMS2xxG
SW2 "Comment" SW_SPST_CK_KMS2xxG 142.325,17.778 r0 top value=CK_KMS2xxG
SW3 "Comment" SW_SPST_CK_KMS2xxG 162.25,21.94 r180 top value=CK_KMS2xxG
TH2 "Comment" R_0603_1608Metric_Pad0.98x0.95mm_HandSolder 141.105,41.39 r90 top value=Thermistor_NTC
U1 "Comment" TSSOP-20_4.4x6.5mm_P0.65mm 151.884,40.87 r0 top value=BQ76920PW
U2 "Comment" SOT-23-6_Handsoldering 129.65,40.94 r180 top value=SN74LVC1T45DCK
U3 "Comment" JST_GH_SM02B-GHS-TB_1x02-1MP_P1.25mm_Horizontal 106.95,27.815 r270 top value=~
U4 "Comment" JST_GH_SM02B-GHS-TB_1x02-1MP_P1.25mm_Horizontal 106.95,20.315 r270 top value=~
U5 "Comment" PinHeader_2x05_P2.54mm_Horizontal 156.94,10.59 r270 top value=~
U6 "Comment" TSSOP-20_4.4x6.5mm_P0.65mm 151.863,19.865 r0 top value=STM32C011F6Px
Y1 "Comment" NX3215SA-32.768K-STD-MUA-8 144.624,23.49 r90 top value=Crystal

## Footprints (in the part's own frame and the unit in brackets; to place one, negate y for a bottom-side part, rotate by r counter-clockwise, add the part's x,y. Pads: shape width x height; smd on the part's side, far side on the other; paste and mask are expansions set on the pad)
AMASS_XT60PW-F_1x02_P7.20mm_Horizontal [mm]
  rrect25% 4.1x4.1 hole 2.7 paste-2539.97 mask-4.1: 1(0,0)
  round 4.1 hole 2.7 paste-2539.97 mask-4.1: 2(-7.2,0)
  rect 0.9x2 hole 1.7 slot 0.6 at 0 deg paste-2539.97 mask-2: Un1(-10.35,6) Un2(3.15,6)
  F.SilkS lines w0.254: 2.267,-1.373 ccw(c0.15,2.15) 4.26,2.15 4.26,7.76 3.41,7.76 3.41,15.46 -10.61,15.46 -10.61,7.76 -11.46,7.76 -11.46,2.15 ccw(c-7.35,2.11) -8.59,-1.809 ; -6.05,-1.96 -2.31,-1.96
  F.CrtYd lines w0.254: -11.85,15.85 4.65,15.85 4.65,-2.55 -11.85,-2.55 -11.85,15.85
AMASS_XT60PW-M_1x02_P7.20mm_Horizontal [mm]
  rrect25% 4.1x4.1 hole 2.7 paste-2539.97 mask-4.1: 1(0,0)
  round 4.1 hole 2.7 paste-2539.97 mask-4.1: 2(7.2,0)
  rect 0.9x2 hole 1.7 slot 0.6 at 0 deg paste-2539.97 mask-2: Un1(-3.15,6) Un2(10.35,6)
  F.SilkS lines w0.254: 6.05,-1.96 2.31,-1.96 ; 8.552,-1.78 ccw(c7.35,2.15) 11.46,2.15 11.46,16.46 -4.26,16.46 -4.26,2.15 ccw(c-0.15,2.15) -2.267,-1.373
  F.CrtYd lines w0.254: 11.85,-2.55 11.85,16.85 -4.65,16.85 -4.65,-2.55 11.85,-2.55
C_0402_1005Metric_Pad0.74x0.62mm_HandSolder [mm]
  rrect25% 0.735x0.62 smd paste-0.735 mask-0.735: 1(-0.567,0) 2(0.567,0)
  F.SilkS lines w0.254: -0.116,-0.36 0.116,-0.36 ; -0.116,0.36 0.116,0.36
  F.CrtYd lines w0.254: -1.08,-0.46 1.08,-0.46 1.08,0.46 -1.08,0.46 -1.08,-0.46
C_0603_1608Metric_Pad1.08x0.95mm_HandSolder [mm]
  rrect25% 1.075x0.95 smd paste-1.075 mask-1.075: 1(-0.863,0) 2(0.863,0)
  F.SilkS lines w0.254: -0.146,-0.51 0.146,-0.51 ; -0.146,0.51 0.146,0.51
  F.CrtYd lines w0.254: -1.65,-0.73 1.65,-0.73 1.65,0.73 -1.65,0.73 -1.65,-0.73
C_0805_2012Metric_Pad1.18x1.45mm_HandSolder [mm]
  rrect21% 1.175x1.45 smd paste-1.45 mask-1.45: 1(-1.038,0) 2(1.038,0)
  F.SilkS lines w0.254: -0.261,0.735 0.261,0.735 ; -0.261,-0.735 0.261,-0.735
  F.CrtYd lines w0.254: -1.88,0.98 -1.88,-0.98 1.88,-0.98 1.88,0.98 -1.88,0.98
C_1210_3225Metric_Pad1.33x2.70mm_HandSolder [mm]
  rrect19% 1.325x2.7 smd paste-2.7 mask-2.7: 1(-1.562,0) 2(1.562,0)
  F.SilkS lines w0.254: 0.711,1.36 -0.711,1.36 ; 0.711,-1.36 -0.711,-1.36
  F.CrtYd lines w0.254: 2.48,1.6 -2.48,1.6 -2.48,-1.6 2.48,-1.6 2.48,1.6
D_0603_1608Metric_Pad1.05x0.95mm_HandSolder [mm]
  rrect25% 1.05x0.95 smd paste-1.05 mask-1.05: 1(-0.875,0) 2(0.875,0)
  F.SilkS lines w0.254: 0.8,-0.735 -1.66,-0.735 -1.66,0.735 0.8,0.735
  F.CrtYd lines w0.254: -1.65,-0.73 1.65,-0.73 1.65,0.73 -1.65,0.73 -1.65,-0.73
D_SOD-523 [mm]
  rrect25% 0.6x0.7 smd paste-0.7 mask-0.7: 1(-0.7,0) 2(0.7,0)
  F.SilkS lines w0.254: 0.7,-0.6 -1.26,-0.6 -1.26,0.6 0.7,0.6
  F.CrtYd lines w0.254: 1.25,-0.7 1.25,0.7 -1.25,0.7 -1.25,-0.7 1.25,-0.7
JST_GH_SM02B-GHS-TB_1x02-1MP_P1.25mm_Horizontal [mm]
  rrect25% 0.6x1.7 smd paste-1.7 mask-1.7: 1(-0.625,1.85) 2(0.625,1.85)
  rrect25% 1x2.7 smd paste-2.7 mask-2.7: MP(-2.475,-1.35) MP(2.475,-1.35)
  F.SilkS lines w0.254: 1.715,-2.56 -1.715,-2.56 ; 2.985,0.26 2.985,1.71 1.185,1.71 ; -2.985,0.26 -2.985,1.71 -1.185,1.71 -1.185,2.7
  F.CrtYd lines w0.254: 3.48,-3.2 1.47,-3.2 1.47,-2.95 -1.47,-2.95 -1.47,-3.2 -3.48,-3.2 -3.48,0.5 -3.38,0.5 -3.38,2.1 -1.43,2.1 -1.43,3.2 1.43,3.2 1.43,2.1 3.38,2.1 3.38,0.5 3.48,0.5 3.48,-3.2
JST_XH_S4B-XH-A_1x04_P2.50mm_Horizontal [mm]
  rrect15% 1.7x1.95 hole 0.95 paste-2539.97 mask-1.95: 1(0,0)
  rrect100% 1.7x1.95 hole 0.95 paste-2539.97 mask-1.95: 2(2.5,0) 3(5,0) 4(7.5,0)
  F.SilkS lines w0.254: -2.56,2.41 -2.56,-9.31 3.75,-9.31 10.06,-9.31 10.06,2.41 8.64,2.41 8.64,-2.09 3.75,-2.09 -1.14,-2.09 -1.14,2.41 -2.56,2.41 ; -0.3,2.1 0,1.5 0.3,2.1 -0.3,2.1 ; -0.25,-3.2 -0.25,-8.7 0.25,-8.7 0.25,-3.2 -0.25,-3.2 ; 2.25,-3.2 2.25,-8.7 2.75,-8.7 2.75,-3.2 2.25,-3.2 ; 4.75,-3.2 4.75,-8.7 5.25,-8.7 5.25,-3.2 4.75,-3.2 ; 7.25,-3.2 7.25,-8.7 7.75,-8.7 7.75,-3.2 7.25,-3.2
  F.CrtYd lines w0.254: -2.95,2.81 -2.95,-9.7 10.45,-9.7 10.45,2.81 -2.95,2.81
MountingHole_3.2mm_M3_DIN965 [mm]
  round 3.2 hole 3.2 paste-2539.97 mask-3.2: Un1(0,0)
  Cmts.User circle w0.254: c0,0 r2.8
  F.CrtYd circle w0.254: c0,0 r3.05
NX3215SA-32.768K-STD-MUA-8 [mm]
  rect 1x1.8 smd paste-1.8 mask-1.8: 1(-1.25,0) 2(1.25,0)
  F.SilkS circle w0.254: c-2.5,1.27 r0.1
  F.SilkS lines w0.254: -0.43,0.75 0.43,0.75 ; -0.43,-0.75 0.43,-0.75
  F.CrtYd lines w0.254: -2,1.15 -2,-1.15 2,-1.15 2,1.15 -2,1.15
PinHeader_2x05_P2.54mm_Horizontal [mm]
  rect 1.7x1.7 hole 1 paste-2539.97 mask-1.7: 1(0,0)
  round 1.7 hole 1 paste-2539.97 mask-1.7: 2(2.54,0) 3(0,-2.54) 4(2.54,-2.54) 5(0,-5.08) 6(2.54,-5.08) 7(0,-7.62) 8(2.54,-7.62) 9(0,-10.16) 10(2.54,-10.16)
  F.SilkS lines w0.254: 1.463,-10.59 1.077,-10.59 ; 1.463,-9.73 1.077,-9.73 ; 1.463,-8.05 1.077,-8.05 ; 1.463,-7.19 1.077,-7.19 ; 1.463,-5.51 1.077,-5.51 ; 1.463,-4.65 1.077,-4.65 ; 1.463,-2.97 1.077,-2.97 ; 1.463,-2.11 1.077,-2.11
R_0402_1005Metric_Pad0.72x0.64mm_HandSolder [mm]
  rrect25% 0.715x0.64 smd paste-0.715 mask-0.715: 1(-0.597,0) 2(0.597,0)
  F.SilkS lines w0.254: -0.168,-0.38 0.168,-0.38 ; -0.168,0.38 0.168,0.38
  F.CrtYd lines w0.254: -1.1,-0.47 1.1,-0.47 1.1,0.47 -1.1,0.47 -1.1,-0.47
R_0603_1608Metric_Pad0.98x0.95mm_HandSolder [mm]
  rrect25% 0.975x0.95 smd paste-0.975 mask-0.975: 1(-0.913,0) 2(0.913,0)
  F.SilkS lines w0.254: -0.255,-0.523 0.255,-0.523 ; -0.255,0.523 0.255,0.523
  F.CrtYd lines w0.254: -1.65,-0.73 1.65,-0.73 1.65,0.73 -1.65,0.73 -1.65,-0.73
R_3920 [mm]
  rect 2.96x5.51 smd paste-5.51 mask-5.51: 1(-4.027,0) 2(4.027,0)
  F.SilkS lines w0.254: -2.23,-2.75 2.23,-2.75 ; -2.23,2.75 2.23,2.75
  F.CrtYd lines w0.254: -5.755,-3.005 -5.755,3.005 5.755,3.005 5.755,-3.005 -5.755,-3.005
riven_sword_20mm_quality [mm]
  F.SilkS region: 1800 vertices and 57 holes, not listed, extent -2.563,-9.391 8.647,-3.408
  F.SilkS region: 618 vertices and 59 holes, not listed, extent -5.548,-7.498 2.515,-4.586
  F.SilkS region: 702 vertices and 14 holes, not listed, extent 3.284,-6.778 5.793,-4.126
  F.SilkS region: 537 vertices and 22 holes, not listed, extent -9.113,-8.538 -4.488,-3.268
  F.SilkS region: 157 vertices and 5 holes, not listed, extent 8.533,-5.869 9.328,-5.038
  F.SilkS region: 1.813,-7.575 1.876,-7.578 1.947,-7.585 2.031,-7.596 2.129,-7.61 2.23,-7.626 2.306,-7.638 2.366,-7.648 2.412,-7.656 2.447,-7.663 2.475,-7.668 2.499,-7.674 2.523,-7.68 2.558,-7.688 2.607,-7.698 2.662,-7.709 2.703,-7.716 2.759,-7.726 2.814,-7.737 2.862,-7.748 2.888,-7.754 2.969,-7.774 3.045,-7.792 3.111,-7.807 3.126,-7.809 3.169,-7.819 3.228,-7.833 3.296,-7.85 3.368,-7.868 3.439,-7.887 3.504,-7.905 3.553,-7.919 3.623,-7.94 3.676,-7.956 3.717,-7.969 3.746,-7.979 3.769,-7.988 3.789,-7.997 3.791,-7.998 3.82,-8.01 3.843,-8.017 3.848,-8.018 3.864,-8.022 3.894,-8.032 3.929,-8.046 3.965,-8.062 3.995,-8.076 4.003,-8.08 4.026,-8.089 4.037,-8.091 4.051,-8.099 4.053,-8.106 4.052,-8.116 4.047,-8.12 4.034,-8.117 4.011,-8.107 3.973,-8.089 3.957,-8.081 3.911,-8.059 3.865,-8.039 3.826,-8.024 3.821,-8.023 3.789,-8.011 3.764,-8.001 3.756,-7.997 3.739,-7.99 3.712,-7.984 3.709,-7.983 3.677,-7.977 3.637,-7.967 3.62,-7.962 3.582,-7.951 3.531,-7.936 3.474,-7.92 3.417,-7.904 3.367,-7.891 3.334,-7.882 3.269,-7.866 3.207,-7.85 3.155,-7.838 3.12,-7.83 3.093,-7.824 3.051,-7.815 3.002,-7.803 2.964,-7.794 2.868,-7.772 2.784,-7.754 2.715,-7.74 2.662,-7.732 2.651,-7.73 2.621,-7.726 2.583,-7.719 2.534,-7.709 2.47,-7.695 2.464,-7.693 2.428,-7.686 2.376,-7.677 2.313,-7.667 2.245,-7.656 2.176,-7.646 2.11,-7.636 2.054,-7.629 2.032,-7.627 1.993,-7.622 1.943,-7.614 1.887,-7.605 1.833,-7.596 1.786,-7.587 1.752,-7.58 1.75,-7.58 1.739,-7.576 1.748,-7.574 1.775,-7.573
  F.SilkS region: -8.535,-3.625 -8.527,-3.629 -8.504,-3.642 -8.492,-3.653 -8.491,-3.654 -8.483,-3.663 -8.48,-3.663 -8.465,-3.669 -8.442,-3.683 -8.435,-3.689 -8.409,-3.706 -8.388,-3.715 -8.384,-3.715 -8.366,-3.72 -8.361,-3.725 -8.351,-3.732 -8.325,-3.746 -8.287,-3.766 -8.241,-3.79 -8.191,-3.815 -8.139,-3.841 -8.089,-3.865 -8.045,-3.886 -8.011,-3.902 -7.989,-3.912 -7.984,-3.913 -7.97,-3.918 -7.946,-3.928 -7.944,-3.929 -7.92,-3.941 -7.883,-3.958 -7.841,-3.977 -7.829,-3.982 -7.757,-4.014 -7.703,-4.04 -7.668,-4.058 -7.651,-4.069 -7.649,-4.072 -7.637,-4.078 -7.621,-4.08 -7.597,-4.086 -7.585,-4.095 -7.564,-4.108 -7.547,-4.111 -7.528,-4.114 -7.522,-4.119 -7.513,-4.129 -7.486,-4.142 -7.446,-4.159 -7.434,-4.164 -7.413,-4.171 -7.434,-4.172 -7.455,-4.168 -7.486,-4.157 -7.5,-4.152 -7.55,-4.129 -7.588,-4.113 -7.621,-4.099 -7.655,-4.085 -7.668,-4.08 -7.709,-4.063 -7.75,-4.045 -7.769,-4.037 -7.796,-4.025 -7.814,-4.018 -7.817,-4.017 -7.829,-4.013 -7.856,-4.001 -7.895,-3.984 -7.941,-3.962 -7.993,-3.938 -8.045,-3.913 -8.096,-3.889 -8.101,-3.886 -8.141,-3.867 -8.175,-3.851 -8.196,-3.842 -8.203,-3.84 -8.215,-3.835 -8.238,-3.822 -8.249,-3.816 -8.278,-3.798 -8.317,-3.776 -8.358,-3.753 -8.361,-3.751 -8.405,-3.726 -8.451,-3.697 -8.487,-3.672 -8.516,-3.651 -8.54,-3.636 -8.552,-3.632 -8.563,-3.625 -8.564,-3.621 -8.556,-3.619
  F.SilkS region: -1.85,-4.595 -1.654,-4.595 -1.459,-4.596 -1.267,-4.596 -1.08,-4.596 -0.899,-4.597 -0.724,-4.597 -0.557,-4.598 -0.398,-4.598 -0.25,-4.599 -0.112,-4.6 0.014,-4.601 0.021,-4.601 0.118,-4.602 0.201,-4.602 0.27,-4.603 0.324,-4.604 0.362,-4.604 0.385,-4.605 0.392,-4.605 0.382,-4.606 0.355,-4.606 0.31,-4.607 0.248,-4.607 0.168,-4.607 0.068,-4.608 -0.05,-4.608 -0.188,-4.608 -0.345,-4.609 -0.523,-4.609 -0.552,-4.609 -0.74,-4.609 -0.945,-4.61 -1.164,-4.61 -1.393,-4.611 -1.63,-4.611 -1.87,-4.612 -2.111,-4.612 -2.348,-4.613 -2.579,-4.613 -2.8,-4.613 -3.008,-4.614 -3.135,-4.614 -3.336,-4.614 -3.517,-4.615 -3.679,-4.615 -3.823,-4.616 -3.95,-4.616 -4.06,-4.617 -4.155,-4.618 -4.235,-4.619 -4.302,-4.62 -4.356,-4.621 -4.398,-4.622 -4.429,-4.624 -4.451,-4.626 -4.463,-4.627 -4.467,-4.629 -4.475,-4.639 -4.491,-4.64 -4.52,-4.632 -4.529,-4.628 -4.551,-4.618 -4.561,-4.607 -4.56,-4.606 -4.55,-4.605 -4.52,-4.604 -4.471,-4.603 -4.404,-4.602 -4.322,-4.601 -4.223,-4.6 -4.111,-4.599 -3.985,-4.599 -3.848,-4.598 -3.699,-4.598 -3.54,-4.597 -3.373,-4.597 -3.198,-4.596 -3.017,-4.596 -2.829,-4.596 -2.638,-4.595 -2.443,-4.595 -2.246,-4.595 -2.048,-4.595
  F.SilkS region: -1.584,-7.517 -1.592,-7.53 -1.603,-7.538 -1.616,-7.539 -1.65,-7.541 -1.703,-7.543 -1.774,-7.544 -1.864,-7.546 -1.971,-7.547 -2.094,-7.549 -2.234,-7.55 -2.388,-7.551 -2.557,-7.552 -2.74,-7.553 -2.772,-7.554 -2.928,-7.554 -3.08,-7.555 -3.227,-7.556 -3.367,-7.557 -3.498,-7.558 -3.619,-7.559 -3.729,-7.56 -3.825,-7.561 -3.907,-7.562 -3.973,-7.563 -4.021,-7.563 -4.05,-7.564 -4.051,-7.564 -4.099,-7.565 -4.138,-7.565 -4.164,-7.564 -4.173,-7.562 -4.173,-7.561 -4.16,-7.557 -4.131,-7.553 -4.092,-7.549 -4.075,-7.548 -4.022,-7.543 -3.965,-7.537 -3.916,-7.53 -3.912,-7.529 -3.89,-7.527 -3.851,-7.525 -3.795,-7.524 -3.722,-7.522 -3.63,-7.521 -3.521,-7.52 -3.392,-7.52 -3.244,-7.519 -3.077,-7.519 -2.889,-7.519 -2.723,-7.519 -2.572,-7.519 -2.427,-7.519 -2.289,-7.519 -2.159,-7.519 -2.04,-7.518 -1.932,-7.518 -1.836,-7.517 -1.754,-7.517 -1.688,-7.516 -1.639,-7.515 -1.607,-7.514 -1.595,-7.513 -1.595,-7.513 -1.585,-7.513
  F.SilkS region: -1.209,-7.535 -1.195,-7.536 -1.161,-7.537 -1.11,-7.538 -1.042,-7.54 -0.96,-7.541 -0.864,-7.543 -0.756,-7.544 -0.637,-7.545 -0.51,-7.547 -0.375,-7.548 -0.233,-7.549 -0.184,-7.549 -0.042,-7.551 0.094,-7.552 0.224,-7.553 0.344,-7.554 0.454,-7.556 0.552,-7.557 0.637,-7.558 0.708,-7.56 0.763,-7.561 0.8,-7.562 0.818,-7.563 0.82,-7.563 0.813,-7.566 0.788,-7.568 0.75,-7.569 0.702,-7.57 0.692,-7.57 0.66,-7.57 0.609,-7.57 0.542,-7.57 0.459,-7.57 0.363,-7.57 0.255,-7.571 0.139,-7.571 0.014,-7.571 -0.116,-7.572 -0.249,-7.572 -0.281,-7.572 -0.412,-7.573 -0.538,-7.573 -0.656,-7.573 -0.765,-7.573 -0.863,-7.573 -0.95,-7.573 -1.023,-7.573 -1.08,-7.573 -1.121,-7.572 -1.143,-7.572 -1.146,-7.571 -1.173,-7.563 -1.188,-7.555 -1.209,-7.54 -1.219,-7.535 -1.222,-7.532
  F.SilkS region: 1.945,-4.641 1.948,-4.663 1.948,-4.668 1.95,-4.692 1.961,-4.705 1.985,-4.713 1.987,-4.714 2.012,-4.719 2.047,-4.724 2.091,-4.728 2.147,-4.732 2.217,-4.736 2.3,-4.739 2.399,-4.743 2.516,-4.746 2.65,-4.75 2.797,-4.753 2.899,-4.755 2.981,-4.758 3.045,-4.761 3.093,-4.765 3.126,-4.769 3.146,-4.774 3.154,-4.78 3.151,-4.788 3.15,-4.788 3.138,-4.79 3.107,-4.792 3.058,-4.794 2.992,-4.796 2.912,-4.798 2.819,-4.799 2.715,-4.8 2.6,-4.801 2.574,-4.802 2.008,-4.805 1.983,-4.782 1.966,-4.762 1.959,-4.745 1.959,-4.745 1.953,-4.725 1.943,-4.709 1.933,-4.688 1.928,-4.663 1.929,-4.642 1.937,-4.632 1.938,-4.632
  F.SilkS region: 4.974,-5.4 4.993,-5.419 5.007,-5.44 5.011,-5.452 5.004,-5.469 4.988,-5.49 4.986,-5.492 4.956,-5.511 4.92,-5.518 4.886,-5.514 4.863,-5.499 4.839,-5.467 4.831,-5.442 4.839,-5.422 4.846,-5.414 4.865,-5.398 4.878,-5.392 4.886,-5.399 4.882,-5.412 4.876,-5.418 4.863,-5.432 4.855,-5.445 4.851,-5.458 4.859,-5.47 4.882,-5.484 4.886,-5.486 4.913,-5.499 4.93,-5.502 4.946,-5.495 4.954,-5.49 4.976,-5.466 4.978,-5.438 4.963,-5.411 4.954,-5.397 4.957,-5.392
  F.SilkS region: 4.899,-8.997 4.943,-9.031 4.994,-9.073 5.051,-9.12 5.11,-9.17 5.169,-9.221 5.226,-9.271 5.278,-9.318 5.323,-9.36 5.358,-9.395 5.382,-9.42 5.389,-9.43 5.396,-9.446 5.388,-9.449 5.366,-9.437 5.365,-9.437 5.348,-9.424 5.32,-9.399 5.284,-9.367 5.245,-9.33 5.24,-9.325 5.192,-9.28 5.137,-9.23 5.084,-9.183 5.048,-9.153 5.005,-9.117 4.975,-9.092 4.953,-9.073 4.936,-9.058 4.921,-9.042 4.904,-9.023 4.891,-9.008 4.85,-8.961
  F.SilkS region: -6.321,-4.487 -6.286,-4.493 -6.205,-4.507 -6.118,-4.522 -6.033,-4.536 -5.958,-4.548 -5.949,-4.549 -5.906,-4.556 -5.852,-4.564 -5.798,-4.572 -5.787,-4.574 -5.694,-4.588 -5.761,-4.588 -5.806,-4.586 -5.851,-4.582 -5.876,-4.579 -5.908,-4.573 -5.957,-4.565 -6.015,-4.555 -6.08,-4.545 -6.146,-4.534 -6.207,-4.525 -6.259,-4.517 -6.267,-4.516 -6.305,-4.509 -6.336,-4.5 -6.353,-4.492 -6.353,-4.492 -6.356,-4.486 -6.347,-4.484
  F.SilkS region: -5.567,-4.585 -5.511,-4.588 -5.45,-4.59 -5.388,-4.592 -5.333,-4.593 -5.291,-4.593 -5.248,-4.592 -5.222,-4.595 -5.209,-4.601 -5.205,-4.606 -5.206,-4.612 -5.213,-4.616 -5.231,-4.619 -5.262,-4.62 -5.308,-4.621 -5.369,-4.621 -5.427,-4.621 -5.477,-4.62 -5.515,-4.619 -5.539,-4.617 -5.545,-4.615 -5.558,-4.609 -5.584,-4.6 -5.602,-4.595 -5.62,-4.589 -5.628,-4.585 -5.623,-4.583 -5.603,-4.583
  F.SilkS region: -8.688,-5.15 -8.672,-5.172 -8.652,-5.201 -8.629,-5.235 -8.607,-5.269 -8.589,-5.298 -8.577,-5.318 -8.574,-5.324 -8.569,-5.336 -8.554,-5.358 -8.547,-5.367 -8.531,-5.393 -8.524,-5.415 -8.524,-5.42 -8.53,-5.423 -8.545,-5.409 -8.569,-5.378 -8.57,-5.376 -8.588,-5.348 -8.609,-5.312 -8.632,-5.272 -8.654,-5.231 -8.673,-5.194 -8.688,-5.165 -8.695,-5.146 -8.695,-5.142
  F.SilkS region: 4.234,-4.731 4.259,-4.742 4.292,-4.76 4.305,-4.767 4.349,-4.792 4.393,-4.816 4.43,-4.835 4.433,-4.837 4.472,-4.855 4.512,-4.874 4.527,-4.881 4.548,-4.893 4.552,-4.899 4.537,-4.9 4.503,-4.896 4.478,-4.892 4.442,-4.882 4.399,-4.866 4.366,-4.85 4.331,-4.829 4.295,-4.804 4.263,-4.778 4.238,-4.755 4.224,-4.738 4.223,-4.729
  F.SilkS region: 3.755,-4.991 3.776,-5 3.8,-5.012 3.819,-5.024 3.824,-5.028 3.845,-5.042 3.882,-5.059 3.929,-5.076 3.981,-5.092 4.032,-5.105 4.062,-5.112 4.073,-5.117 4.064,-5.119 4.036,-5.117 3.992,-5.113 3.98,-5.112 3.935,-5.103 3.888,-5.088 3.87,-5.08 3.836,-5.061 3.802,-5.04 3.773,-5.019 3.752,-5.002 3.744,-4.991 3.744,-4.989
  F.SilkS region: -9.328,-3.271 -9.32,-3.304 -9.31,-3.352 -9.31,-3.354 -9.301,-3.403 -9.293,-3.45 -9.286,-3.487 -9.283,-3.501 -9.276,-3.537 -9.27,-3.574 -9.267,-3.605 -9.267,-3.626 -9.268,-3.632 -9.275,-3.623 -9.282,-3.608 -9.289,-3.582 -9.299,-3.54 -9.31,-3.489 -9.32,-3.435 -9.329,-3.383 -9.336,-3.338 -9.338,-3.317 -9.341,-3.277 -9.339,-3.257 -9.335,-3.255
  F.SilkS region: -7.49,-6.742 -7.489,-6.742 -7.468,-6.758 -7.437,-6.782 -7.401,-6.809 -7.396,-6.813 -7.365,-6.838 -7.343,-6.858 -7.332,-6.871 -7.332,-6.873 -7.326,-6.877 -7.317,-6.875 -7.305,-6.874 -7.305,-6.883 -7.316,-6.898 -7.335,-6.896 -7.364,-6.878 -7.367,-6.876 -7.406,-6.842 -7.444,-6.808 -7.476,-6.776 -7.498,-6.751 -7.503,-6.742 -7.51,-6.729 -7.506,-6.729
  F.SilkS region: -6.83,-7.272 -6.809,-7.284 -6.806,-7.287 -6.777,-7.308 -6.745,-7.331 -6.741,-7.334 -6.718,-7.351 -6.691,-7.373 -6.663,-7.397 -6.638,-7.419 -6.621,-7.436 -6.615,-7.444 -6.616,-7.444 -6.626,-7.438 -6.648,-7.424 -6.663,-7.414 -6.696,-7.39 -6.731,-7.368 -6.741,-7.363 -6.774,-7.342 -6.805,-7.318 -6.828,-7.297 -6.842,-7.28 -6.842,-7.272
  F.SilkS region: 4.319,-3.75 4.344,-3.751 4.453,-3.764 4.551,-3.793 4.628,-3.832 4.655,-3.85 4.673,-3.862 4.678,-3.867 4.67,-3.871 4.65,-3.867 4.626,-3.856 4.61,-3.848 4.587,-3.839 4.553,-3.827 4.505,-3.811 4.442,-3.79 4.401,-3.777 4.367,-3.77 4.333,-3.766 4.3,-3.763 4.272,-3.756 4.267,-3.752 4.283,-3.75
  F.SilkS region: -7.266,-6.902 -7.233,-6.926 -7.188,-6.964 -7.137,-7.011 -7.099,-7.045 -7.059,-7.082 -7.029,-7.109 -7.003,-7.134 -6.992,-7.148 -6.996,-7.151 -7.013,-7.143 -7.043,-7.124 -7.076,-7.1 -7.108,-7.075 -7.144,-7.044 -7.183,-7.01 -7.22,-6.975 -7.253,-6.944 -7.278,-6.919 -7.291,-6.903 -7.293,-6.899 -7.286,-6.893
  F.SilkS region: 3.95,-5.502 3.954,-5.516 3.956,-5.524 3.963,-5.551 3.967,-5.571 3.969,-5.592 3.969,-5.619 3.967,-5.657 3.965,-5.681 3.962,-5.73 3.957,-5.76 3.953,-5.77 3.949,-5.761 3.946,-5.734 3.944,-5.691 3.943,-5.63 3.943,-5.63 3.943,-5.571 3.943,-5.53 3.944,-5.507 3.946,-5.498
  F.SilkS region: 4.103,-4.53 4.097,-4.54 4.087,-4.554 4.087,-4.57 4.097,-4.591 4.121,-4.623 4.131,-4.636 4.154,-4.664 4.169,-4.685 4.175,-4.694 4.174,-4.694 4.165,-4.688 4.145,-4.669 4.117,-4.643 4.102,-4.629 4.035,-4.564 4.059,-4.546 4.08,-4.533 4.096,-4.527
  F.SilkS region: 4.694,-8.276 4.695,-8.277 4.704,-8.295 4.702,-8.313 4.694,-8.33 4.683,-8.362 4.677,-8.398 4.677,-8.4 4.674,-8.434 4.668,-8.464 4.668,-8.466 4.665,-8.468 4.662,-8.452 4.661,-8.419 4.661,-8.388 4.663,-8.329 4.667,-8.29 4.673,-8.268 4.682,-8.264
  F.SilkS region: -8.493,-5.457 -8.472,-5.485 -8.452,-5.517 -8.429,-5.554 -8.411,-5.584 -8.402,-5.603 -8.401,-5.608 -8.408,-5.602 -8.425,-5.584 -8.447,-5.557 -8.448,-5.556 -8.47,-5.526 -8.485,-5.502 -8.491,-5.489 -8.499,-5.475 -8.503,-5.474 -8.511,-5.462 -8.51,-5.45 -8.505,-5.446
  F.SilkS region: -6.596,-7.45 -6.579,-7.459 -6.551,-7.478 -6.519,-7.499 -6.49,-7.52 -6.468,-7.536 -6.459,-7.544 -6.459,-7.544 -6.46,-7.547 -6.465,-7.547 -6.476,-7.54 -6.498,-7.526 -6.534,-7.502 -6.535,-7.502 -6.567,-7.479 -6.592,-7.461 -6.604,-7.45 -6.605,-7.449 -6.603,-7.447
  F.SilkS region: -7.938,-6.281 -7.925,-6.291 -7.904,-6.311 -7.873,-6.343 -7.831,-6.388 -7.784,-6.438 -7.761,-6.464 -7.746,-6.483 -7.743,-6.492 -7.751,-6.486 -7.771,-6.468 -7.8,-6.44 -7.835,-6.405 -7.848,-6.391 -7.884,-6.352 -7.914,-6.319 -7.934,-6.295 -7.944,-6.281 -7.944,-6.28
  F.SilkS region: 3.883,-3.355 3.896,-3.372 3.898,-3.374 3.912,-3.394 3.936,-3.421 3.953,-3.436 3.974,-3.457 3.984,-3.471 3.982,-3.475 3.968,-3.468 3.946,-3.45 3.918,-3.424 3.917,-3.423 3.891,-3.396 3.873,-3.373 3.865,-3.361 3.865,-3.36 3.871,-3.35
  F.SilkS region: -8.913,-4.713 -8.901,-4.734 -8.887,-4.762 -8.875,-4.788 -8.868,-4.808 -8.868,-4.814 -8.878,-4.812 -8.889,-4.804 -8.904,-4.786 -8.908,-4.775 -8.914,-4.756 -8.918,-4.752 -8.926,-4.739 -8.928,-4.721 -8.925,-4.707 -8.921,-4.705
  F.SilkS region: 3.773,-6.88 3.786,-6.903 3.802,-6.936 3.804,-6.94 3.821,-6.979 3.828,-7.007 3.826,-7.02 3.817,-7.018 3.799,-6.999 3.789,-6.984 3.776,-6.957 3.765,-6.926 3.76,-6.898 3.761,-6.878 3.766,-6.872
  F.SilkS region: 1.033,-7.561 1.086,-7.562 1.104,-7.563 1.103,-7.564 1.084,-7.565 1.049,-7.565 1,-7.566 0.95,-7.565 0.915,-7.565 0.897,-7.564 0.896,-7.563 0.914,-7.562 0.97,-7.561
  F.SilkS region: 3.67,-4.197 3.675,-4.197 3.684,-4.199 3.674,-4.2 3.647,-4.201 3.631,-4.201 3.599,-4.201 3.582,-4.2 3.584,-4.198 3.592,-4.197 3.631,-4.195
  F.SilkS region: 4.069,-7.958 4.073,-7.98 4.074,-7.981 4.077,-8.012 4.074,-8.035 4.073,-8.039 4.068,-8.04 4.065,-8.021 4.065,-7.997 4.065,-7.965 4.066,-7.952
  F.SilkS region: -9.349,-3.102 -9.345,-3.132 -9.341,-3.17 -9.341,-3.189 -9.344,-3.19 -9.349,-3.178 -9.353,-3.157 -9.354,-3.126 -9.354,-3.118 -9.353,-3.095 -9.352,-3.089
  F.SilkS region: 5.404,-3.86 5.407,-3.881 5.407,-3.886 5.405,-3.911 5.398,-3.923 5.397,-3.923 5.389,-3.914 5.386,-3.893 5.39,-3.869 5.397,-3.856
  F.SilkS region: 3.831,-7.063 3.84,-7.074 3.852,-7.098 3.855,-7.113 3.851,-7.13 3.844,-7.129 3.84,-7.119 3.835,-7.099 3.83,-7.08 3.827,-7.062
  F.SilkS region: -6.668,-4.409 -6.636,-4.415 -6.611,-4.422 -6.605,-4.424 -6.599,-4.431 -6.608,-4.433 -6.627,-4.431 -6.653,-4.425 -6.678,-4.417 -6.715,-4.402
  F.SilkS region: 2.013,-4.63 2.045,-4.635 2.02,-4.649 1.989,-4.661 1.97,-4.659 1.963,-4.652 1.963,-4.638 1.979,-4.63 2.008,-4.629
  F.SilkS region: -6.546,-4.442 -6.543,-4.444 -6.534,-4.452 -6.545,-4.454 -6.55,-4.455 -6.571,-4.45 -6.579,-4.444 -6.578,-4.436 -6.565,-4.435
  F.SilkS region: 5.738,-4.86 5.741,-4.877 5.737,-4.896 5.73,-4.903 5.722,-4.894 5.72,-4.877 5.723,-4.857 5.73,-4.851
  F.SilkS region: 4.128,-3.52 4.133,-3.523 4.12,-3.524 4.105,-3.525 4.082,-3.524 4.076,-3.522 4.081,-3.52 4.112,-3.518
  F.SilkS region: 3.835,-3.316 3.836,-3.317 3.838,-3.328 3.83,-3.333 3.813,-3.334 3.808,-3.33 3.809,-3.318 3.821,-3.312
  F.SilkS region: 4.455,-5.555 4.454,-5.559 4.444,-5.569 4.443,-5.57 4.438,-5.561 4.438,-5.559 4.446,-5.549 4.449,-5.549
  F.SilkS region: 5.019,-8.818 5.022,-8.83 5.017,-8.847 5.011,-8.851 5.002,-8.843 5.001,-8.836 5.007,-8.819 5.011,-8.815
  F.SilkS region: 4.727,-8.861 4.753,-8.881 4.761,-8.891 4.757,-8.893 4.747,-8.887 4.728,-8.871 4.723,-8.866 4.693,-8.839
  F.SilkS region: -3.013,-6.699 -3.006,-6.705 -3.009,-6.713 -3.02,-6.716 -3.04,-6.711 -3.047,-6.705 -3.044,-6.697 -3.033,-6.695
  F.SilkS region: -6.727,-4.396 -6.727,-4.399 -6.743,-4.401 -6.746,-4.401 -6.762,-4.399 -6.761,-4.396 -6.759,-4.395 -6.736,-4.394
  F.SilkS region: -8.554,-3.691 -8.553,-3.694 -8.557,-3.704 -8.558,-3.705 -8.567,-3.697 -8.569,-3.694 -8.568,-3.685 -8.565,-3.684
  F.SilkS region: -5.816,-6.432 -5.813,-6.444 -5.818,-6.461 -5.824,-6.465 -5.833,-6.457 -5.834,-6.45 -5.828,-6.433 -5.824,-6.429
  F.SilkS region: -6.438,-7.557 -6.424,-7.565 -6.41,-7.578 -6.408,-7.585 -6.419,-7.583 -6.433,-7.574 -6.446,-7.562 -6.448,-7.555
  F.SilkS region: 8.555,-5.796 8.555,-5.796 8.563,-5.814 8.562,-5.821 8.556,-5.823 8.551,-5.81 8.548,-5.794
  F.SilkS region: 5.711,-4.807 5.719,-4.823 5.717,-4.836 5.708,-4.833 5.699,-4.82 5.693,-4.803 5.699,-4.799
  F.SilkS region: 4.554,-5.627 4.563,-5.637 4.552,-5.642 4.547,-5.642 4.536,-5.637 4.537,-5.632 4.55,-5.626
  F.SilkS region: -1.335,-7.449 -1.324,-7.46 -1.326,-7.466 -1.328,-7.466 -1.337,-7.458 -1.34,-7.454 -1.341,-7.446
  F.SilkS region: -1.539,-7.296 -1.537,-7.299 -1.533,-7.308 -1.543,-7.305 -1.552,-7.299 -1.56,-7.291 -1.556,-7.289
  F.SilkS region: -6.972,-7.168 -6.96,-7.178 -6.963,-7.184 -6.964,-7.184 -6.973,-7.177 -6.976,-7.172 -6.977,-7.165
  F.SilkS region: -7.972,-6.241 -7.96,-6.251 -7.963,-6.257 -7.964,-6.257 -7.973,-6.25 -7.976,-6.245 -7.977,-6.238
  F.SilkS region: -7.555,-6.688 -7.544,-6.698 -7.543,-6.701 -7.548,-6.705 -7.558,-6.695 -7.56,-6.693 -7.561,-6.686
  F.SilkS region: 4.435,-4.344 4.433,-4.35 4.428,-4.351 4.419,-4.347 4.421,-4.344 4.433,-4.342
  F.SilkS region: 4.206,-4.708 4.204,-4.714 4.199,-4.715 4.19,-4.711 4.192,-4.708 4.204,-4.707
  F.SilkS region: 4.518,-5.604 4.517,-5.61 4.511,-5.611 4.503,-5.607 4.504,-5.604 4.517,-5.603
  F.SilkS region: 3.633,-5.067 3.634,-5.084 3.632,-5.087 3.627,-5.084 3.626,-5.074 3.629,-5.063
  F.SilkS region: 4.695,-6.177 4.694,-6.183 4.688,-6.184 4.68,-6.18 4.681,-6.177 4.694,-6.176
  F.SilkS region: 3.872,-7.15 3.873,-7.172 3.872,-7.177 3.868,-7.178 3.867,-7.164 3.868,-7.149
  F.SilkS region: 4.07,-7.526 4.072,-7.542 4.069,-7.546 4.065,-7.543 4.064,-7.533 4.067,-7.521
  F.SilkS region: 4.685,-8.193 4.686,-8.209 4.684,-8.213 4.679,-8.21 4.679,-8.199 4.681,-8.188
  F.SilkS region: 4.664,-8.506 4.665,-8.522 4.663,-8.526 4.659,-8.522 4.658,-8.512 4.66,-8.501
  F.SilkS region: 4.674,-8.813 4.676,-8.825 4.674,-8.827 4.668,-8.826 4.667,-8.82 4.671,-8.811
  F.SilkS region: -1.358,-7.427 -1.359,-7.434 -1.365,-7.434 -1.373,-7.431 -1.372,-7.427 -1.359,-7.426
  F.SilkS region: -2.212,-7.115 -2.214,-7.121 -2.219,-7.122 -2.228,-7.118 -2.226,-7.115 -2.214,-7.114
  F.SilkS region: -2.243,-7.094 -2.245,-7.1 -2.25,-7.101 -2.259,-7.097 -2.257,-7.094 -2.245,-7.093
  F.SilkS region: -2.296,-7.063 -2.297,-7.069 -2.302,-7.07 -2.311,-7.066 -2.309,-7.063 -2.297,-7.062
  F.SilkS region: -2.337,-7.042 -2.339,-7.048 -2.344,-7.049 -2.353,-7.045 -2.351,-7.042 -2.339,-7.041
  F.SilkS region: -6.973,-4.323 -6.975,-4.329 -6.98,-4.33 -6.989,-4.326 -6.987,-4.323 -6.975,-4.322
  F.SilkS region: -7.348,-4.198 -7.35,-4.204 -7.355,-4.205 -7.364,-4.201 -7.362,-4.198 -7.35,-4.197
  F.SilkS region: -7.755,-4.125 -7.756,-4.131 -7.762,-4.132 -7.77,-4.128 -7.769,-4.125 -7.756,-4.124
  F.SilkS region: -7.858,-4.073 -7.861,-4.078 -7.872,-4.079 -7.883,-4.076 -7.878,-4.073 -7.862,-4.071
  F.SilkS region: -7.994,-4.021 -7.996,-4.027 -8.001,-4.028 -8.01,-4.024 -8.008,-4.021 -7.996,-4.019
  F.SilkS region: -8.036,-4 -8.037,-4.006 -8.043,-4.007 -8.052,-4.003 -8.05,-4 -8.038,-3.999
  F.SilkS region: -8.088,-3.969 -8.09,-3.975 -8.095,-3.975 -8.104,-3.972 -8.102,-3.969 -8.09,-3.967
  F.SilkS region: -8.192,-3.916 -8.194,-3.923 -8.199,-3.923 -8.208,-3.92 -8.206,-3.916 -8.194,-3.915
  F.SilkS region: -8.244,-3.896 -8.246,-3.902 -8.251,-3.903 -8.26,-3.899 -8.258,-3.896 -8.246,-3.894
  F.SilkS region: -8.38,-3.812 -8.381,-3.818 -8.387,-3.819 -8.395,-3.815 -8.394,-3.812 -8.381,-3.811
  F.SilkS region: -8.422,-3.791 -8.42,-3.804 -8.422,-3.805 -8.428,-3.804 -8.428,-3.798 -8.425,-3.79
  F.SilkS region: -8.453,-3.76 -8.452,-3.773 -8.453,-3.774 -8.459,-3.773 -8.46,-3.767 -8.456,-3.759
  F.SilkS region: -4.702,-7.615 -4.704,-7.621 -4.709,-7.622 -4.718,-7.618 -4.716,-7.615 -4.704,-7.614
  F.SilkS region: -8.942,-4.661 -8.941,-4.677 -8.943,-4.681 -8.948,-4.678 -8.949,-4.667 -8.946,-4.656
  F.SilkS region: -8.713,-5.104 -8.712,-5.117 -8.713,-5.118 -8.719,-5.117 -8.72,-5.111 -8.716,-5.103
  F.SilkS region: -6.359,-7.615 -6.36,-7.621 -6.366,-7.622 -6.374,-7.618 -6.373,-7.615 -6.36,-7.614
  F.SilkS region: 8.679,-5.439 8.673,-5.444 8.668,-5.439 8.673,-5.434
  F.SilkS region: 3.282,-5.919 3.277,-5.924 3.271,-5.919 3.277,-5.913
  F.SilkS region: 4.667,-8.565 4.662,-8.57 4.657,-8.565 4.662,-8.56
  F.SilkS region: 4.334,-8.356 4.329,-8.362 4.324,-8.356 4.329,-8.351
  F.SilkS region: 4.845,-8.95 4.839,-8.955 4.834,-8.95 4.839,-8.945
  F.SilkS region: -1.386,-7.408 -1.391,-7.414 -1.396,-7.408 -1.391,-7.403
  F.SilkS region: -1.5,-7.325 -1.505,-7.33 -1.511,-7.325 -1.505,-7.32
  F.SilkS region: -1.573,-7.273 -1.578,-7.278 -1.584,-7.273 -1.578,-7.268
  F.SilkS region: -1.604,-7.252 -1.61,-7.257 -1.615,-7.252 -1.61,-7.247
  F.SilkS region: -1.854,-7.096 -1.86,-7.101 -1.865,-7.096 -1.86,-7.091
  F.SilkS region: -3.063,-6.679 -3.068,-6.684 -3.073,-6.679 -3.068,-6.674
  F.SilkS region: -6.824,-4.377 -6.829,-4.382 -6.834,-4.377 -6.829,-4.371
  F.SilkS region: -7.647,-4.179 -7.652,-4.184 -7.658,-4.179 -7.652,-4.173
  F.SilkS region: -5.178,-6.762 -5.183,-6.768 -5.188,-6.762 -5.183,-6.757
  F.SilkS region: -7.908,-4.054 -7.913,-4.059 -7.918,-4.054 -7.913,-4.048
  F.SilkS region: -8.293,-3.866 -8.298,-3.871 -8.303,-3.866 -8.298,-3.861
  F.SilkS region: -8.522,-3.72 -8.527,-3.725 -8.533,-3.72 -8.527,-3.715
  F.SilkS region: -5.324,-7.836 -5.329,-7.841 -5.334,-7.836 -5.329,-7.83
  F.SilkS region: -6.386,-7.596 -6.392,-7.601 -6.397,-7.596 -6.392,-7.591
  F.SilkS region: -8.033,-6.169 -8.038,-6.174 -8.043,-6.169 -8.038,-6.163
  F.SilkS region: -8.012,-6.2 -8.017,-6.205 -8.022,-6.2 -8.017,-6.195
  F.SilkS region: -7.72,-6.512 -7.725,-6.518 -7.73,-6.512 -7.725,-6.507
  F.SilkS region: -7.564,-6.669 -7.569,-6.674 -7.574,-6.669 -7.569,-6.663